# Altium PCB SAMV71_Xplained_Ultra.PcbDoc (part 1 of 9)
Units mm, origin at the board's own origin, x right, y up, seen from the top; angles counter-clockwise.
Board outline 90 x 135 mm, 8 copper layers (Top Layer LF-Signals, Ground Plane 1 (GND), Power Plane (VCC), Ground Plane 2 (GND), Signal Layer 1, Signal Layer 2, Ground Plane 3 (GND), Bottom Layer LF-Signals), stack 1.632 mm thick; 483 components, 411 nets, 1994 pads, 1021 vias.
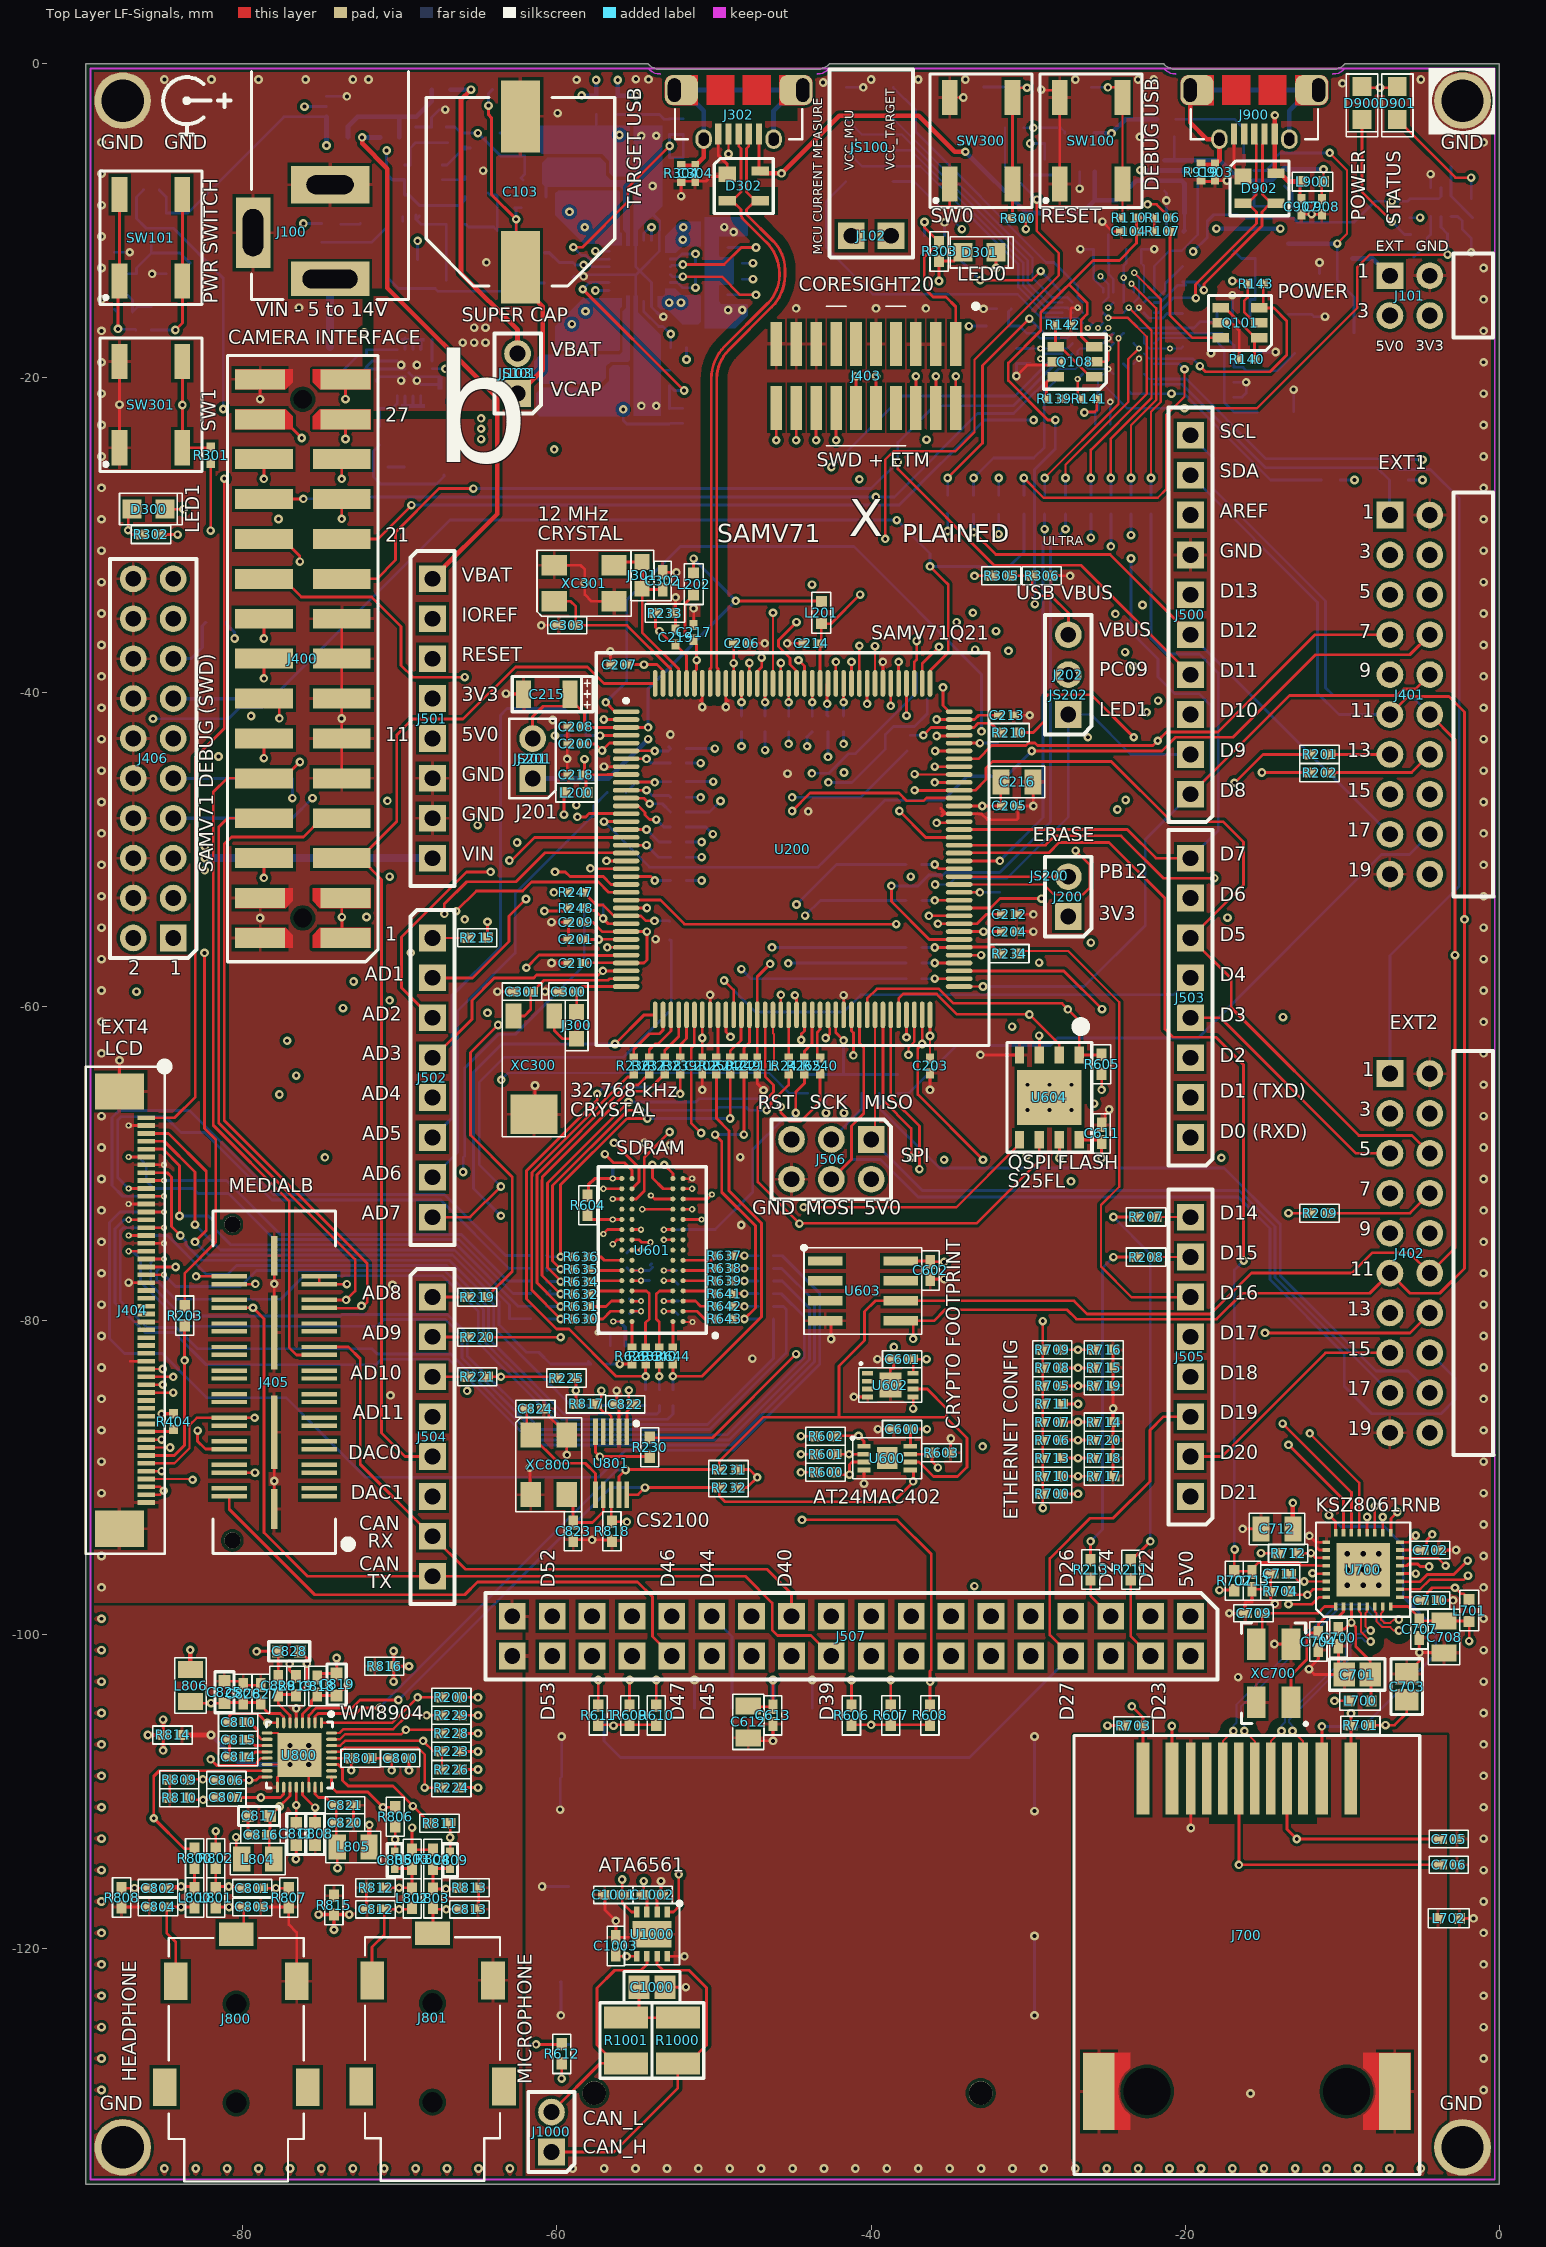
[diagram p0: Top Layer LF-Signals view]
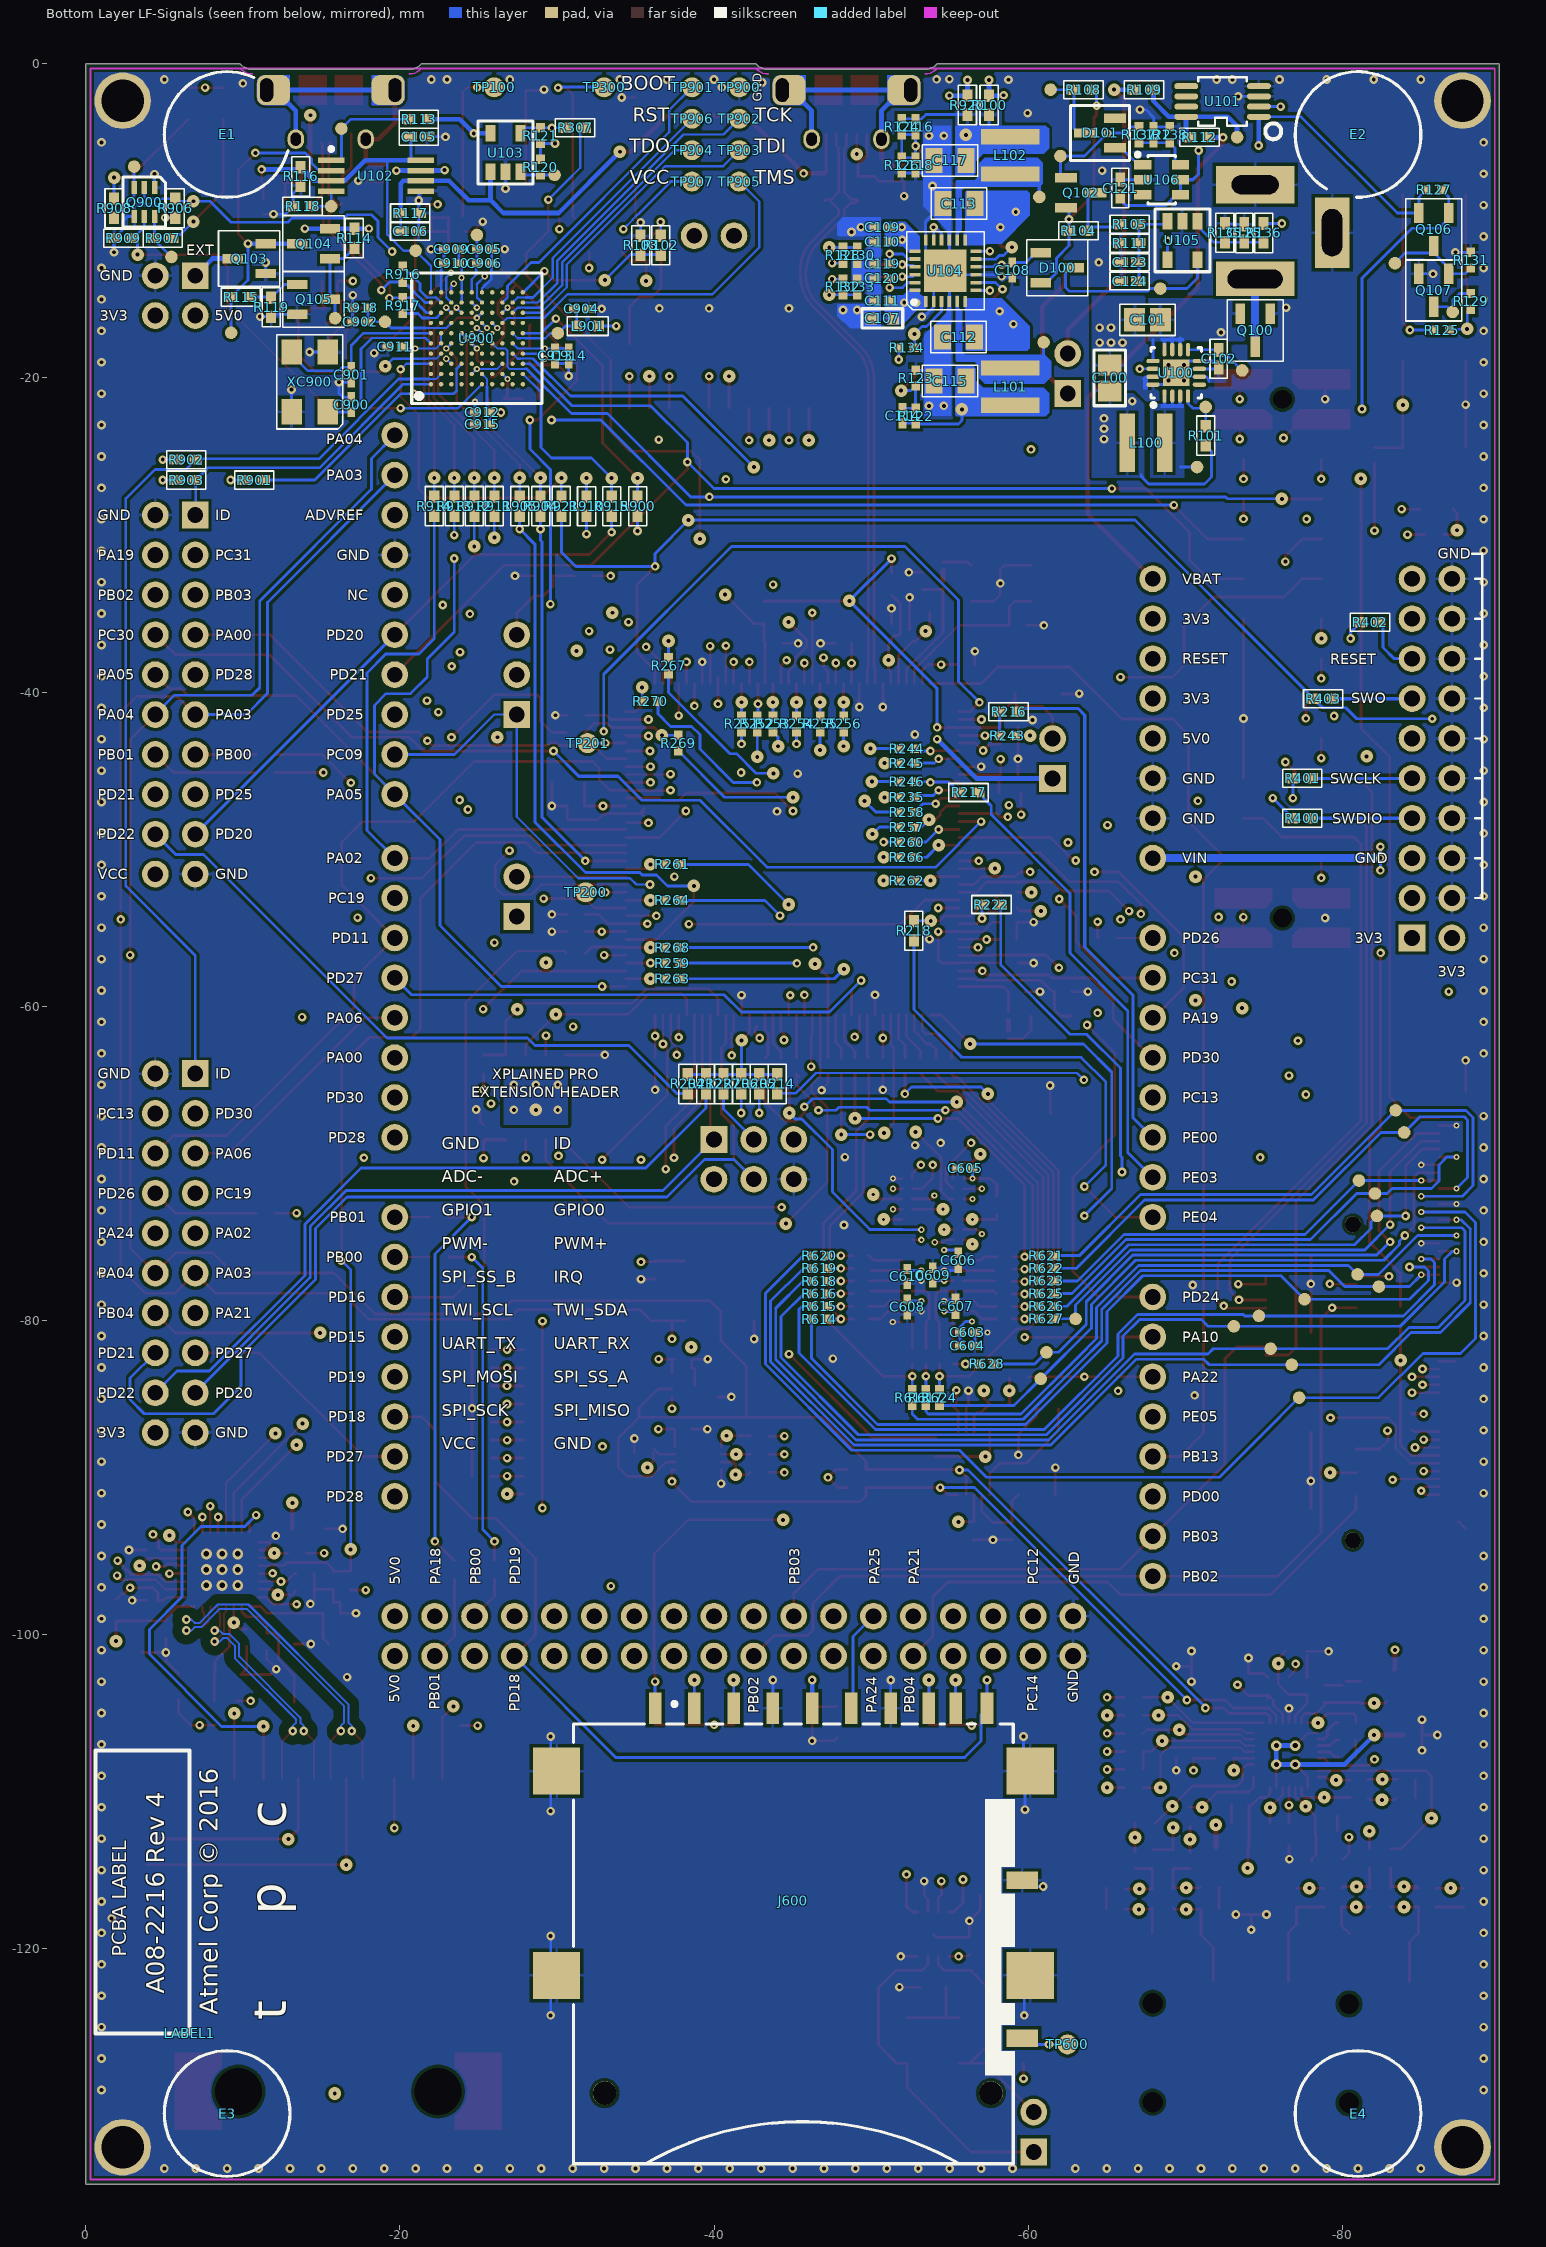
[diagram p1: Bottom Layer LF-Signals view, seen from below]
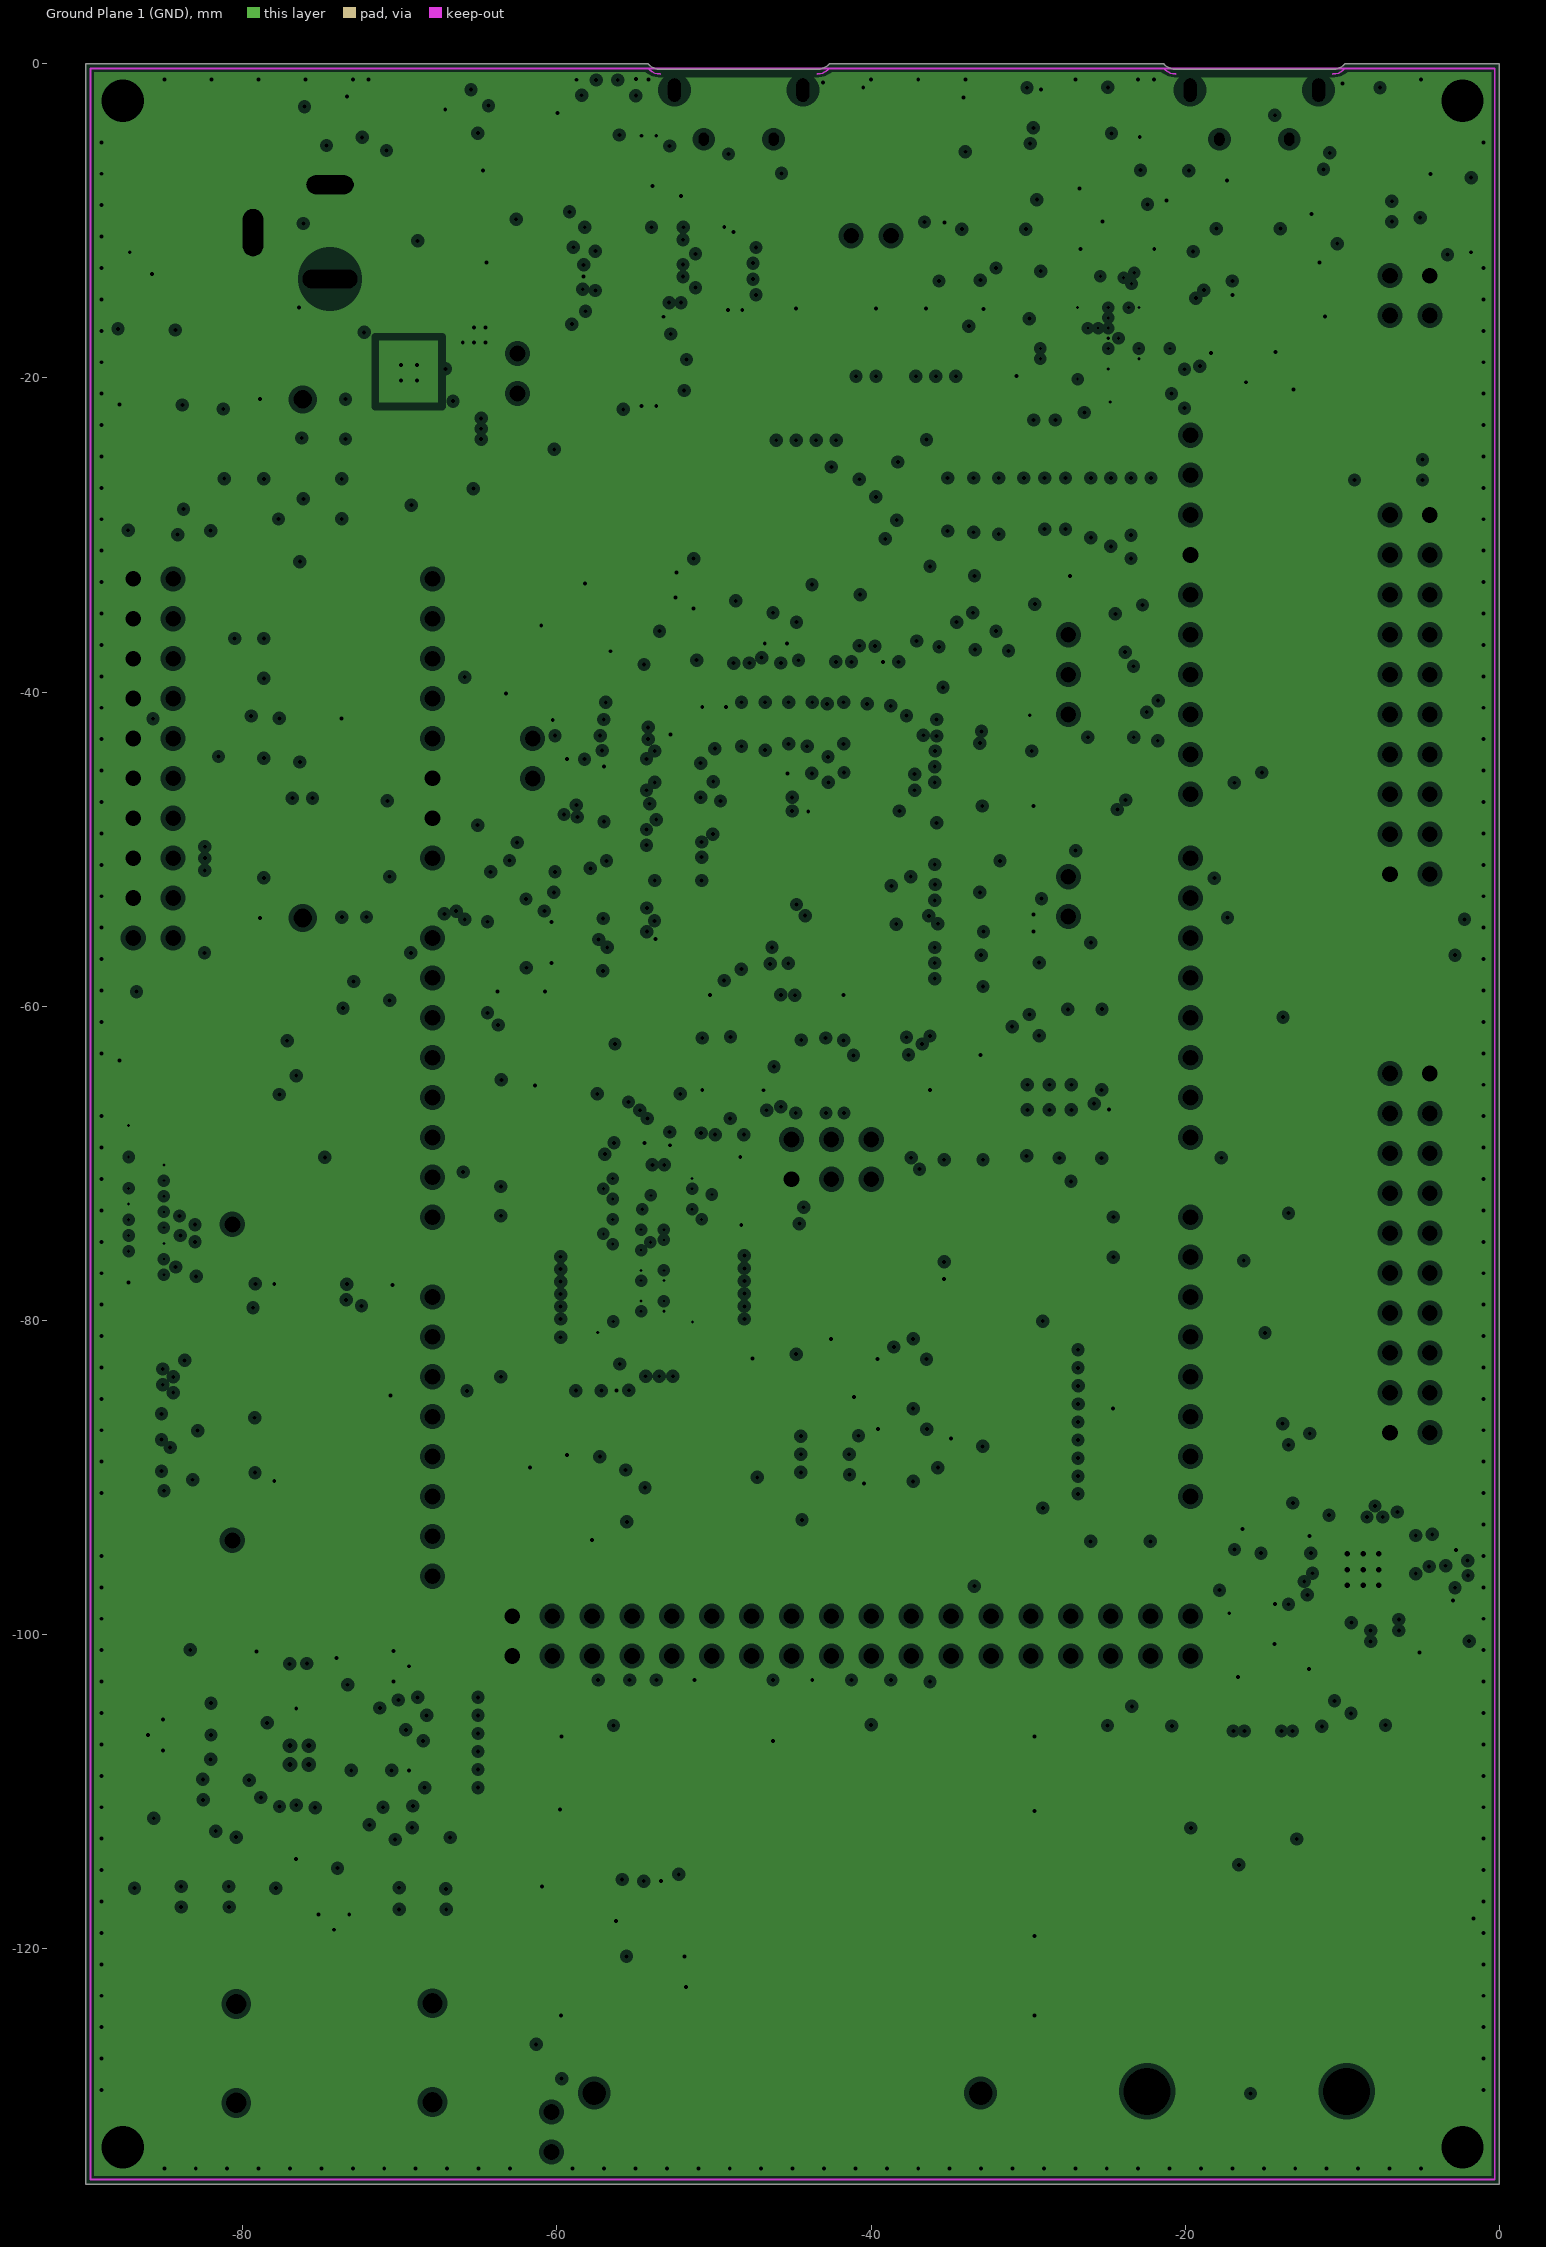
[diagram p2: Ground Plane 1 (GND), clearances drawn from the general rule]
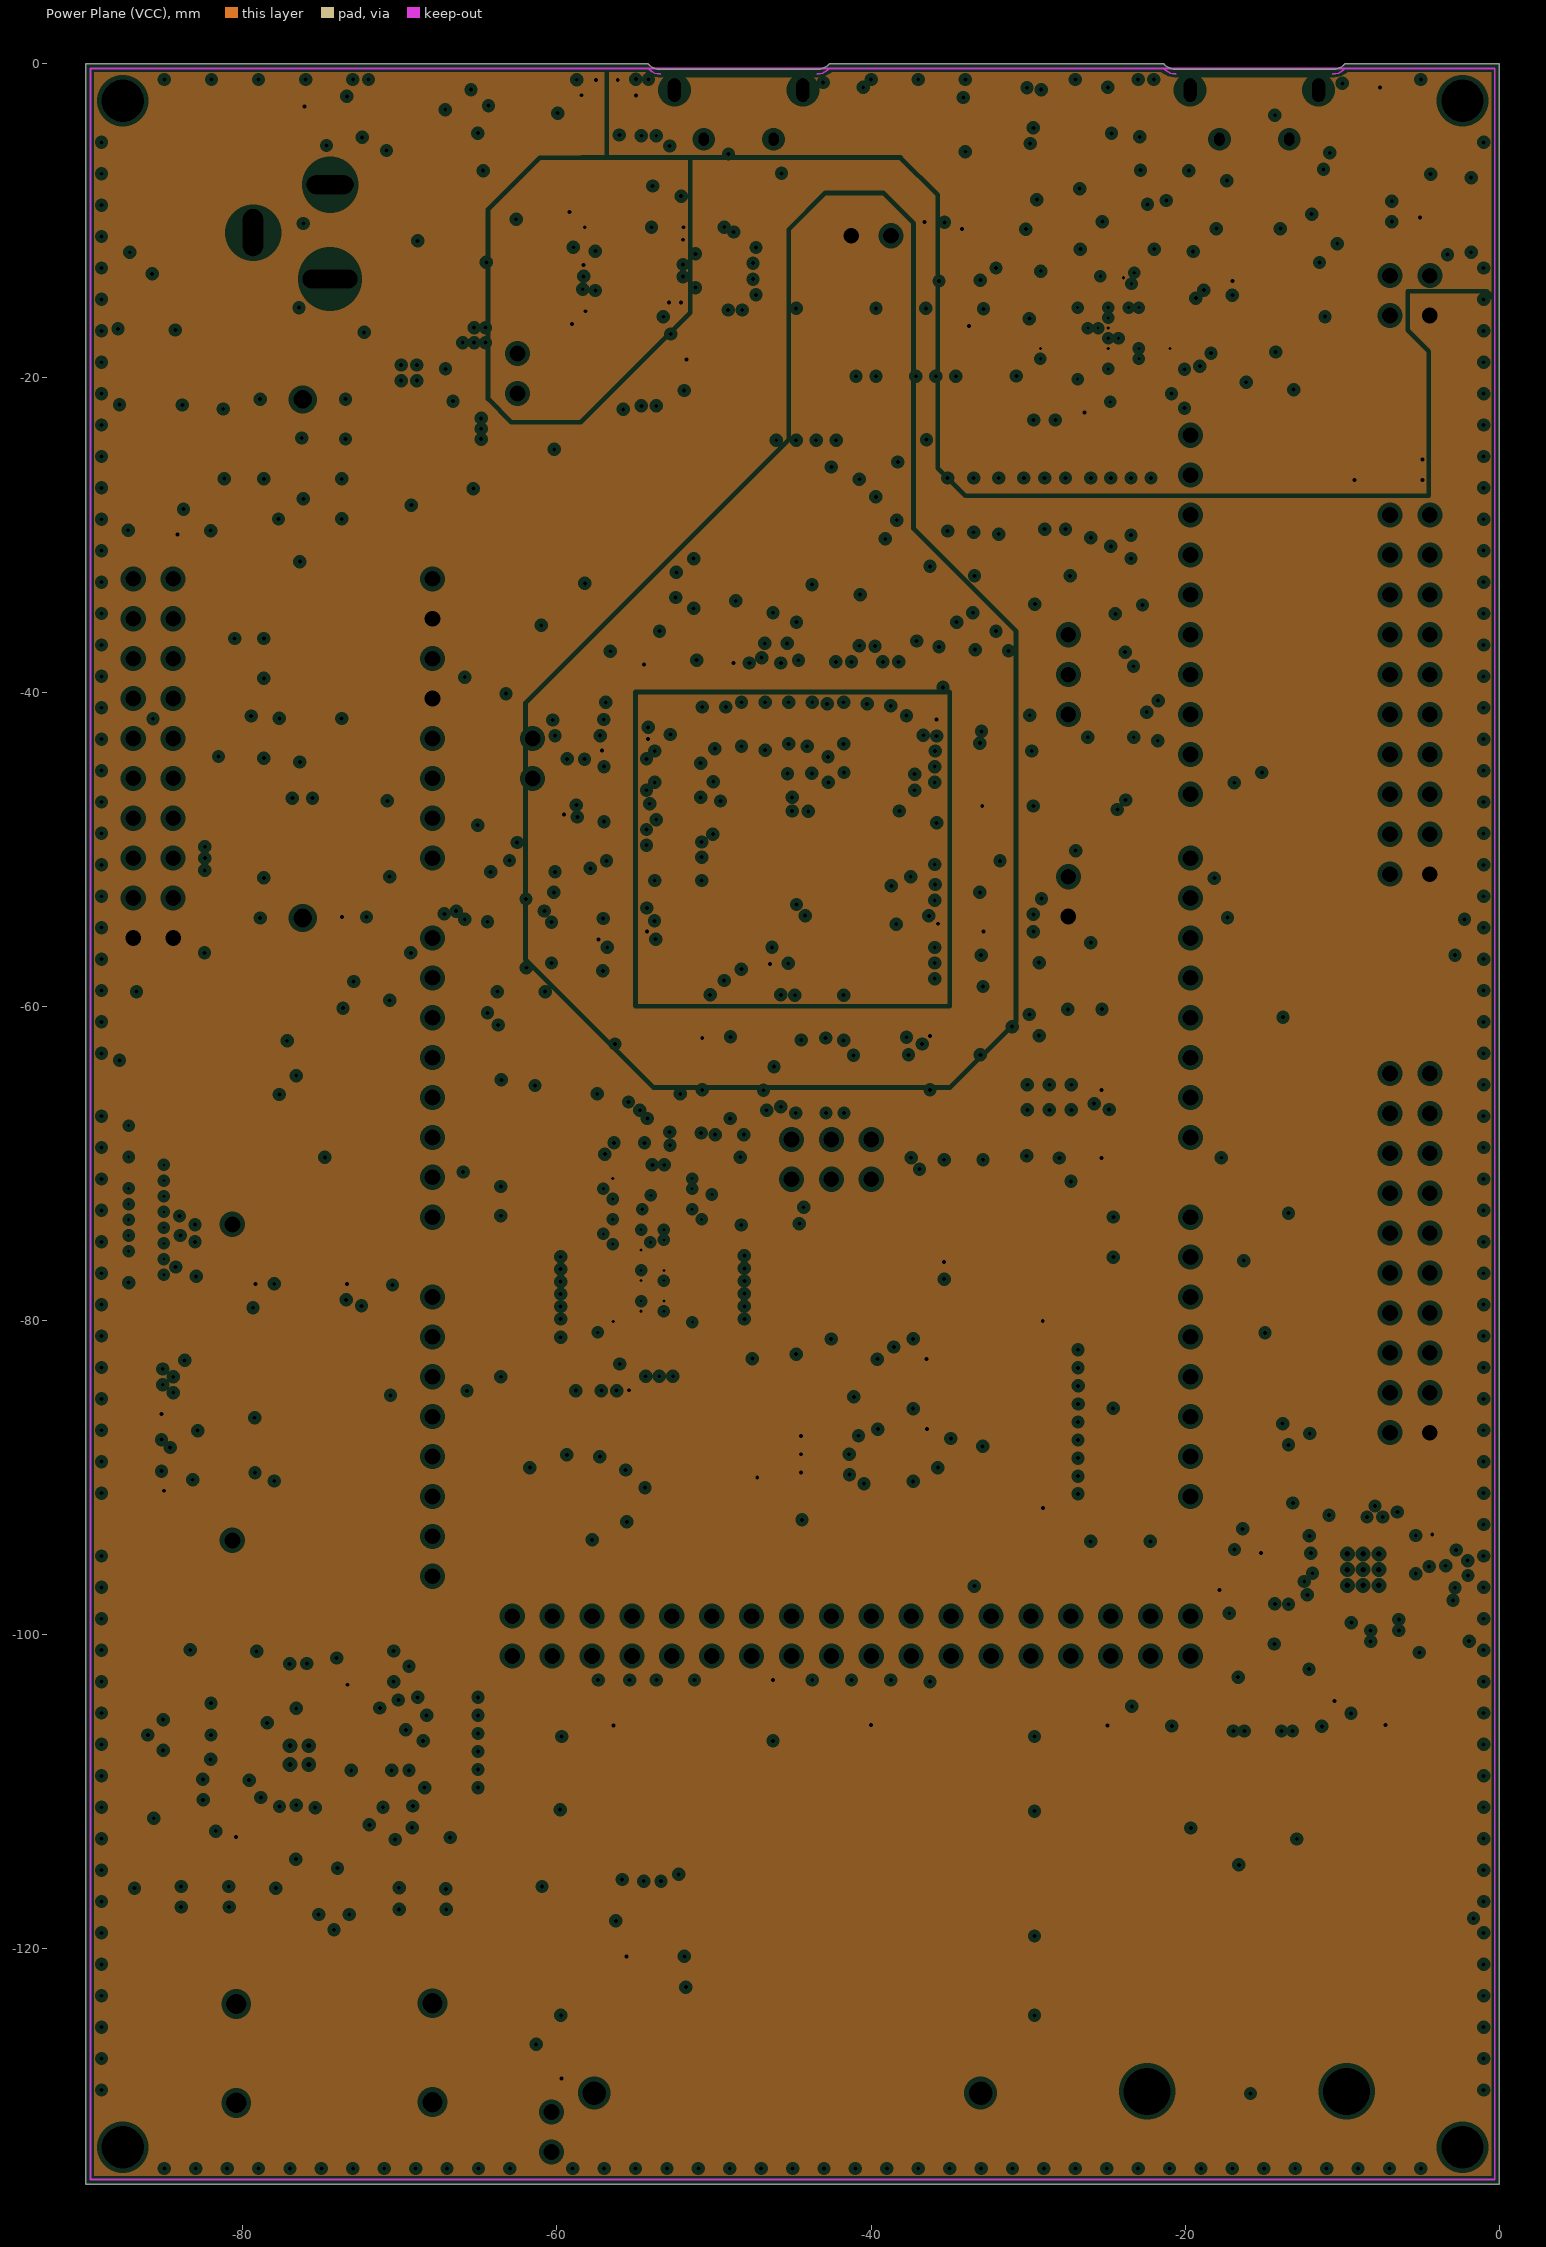
[diagram p3: Power Plane (VCC), clearances drawn from the general rule]
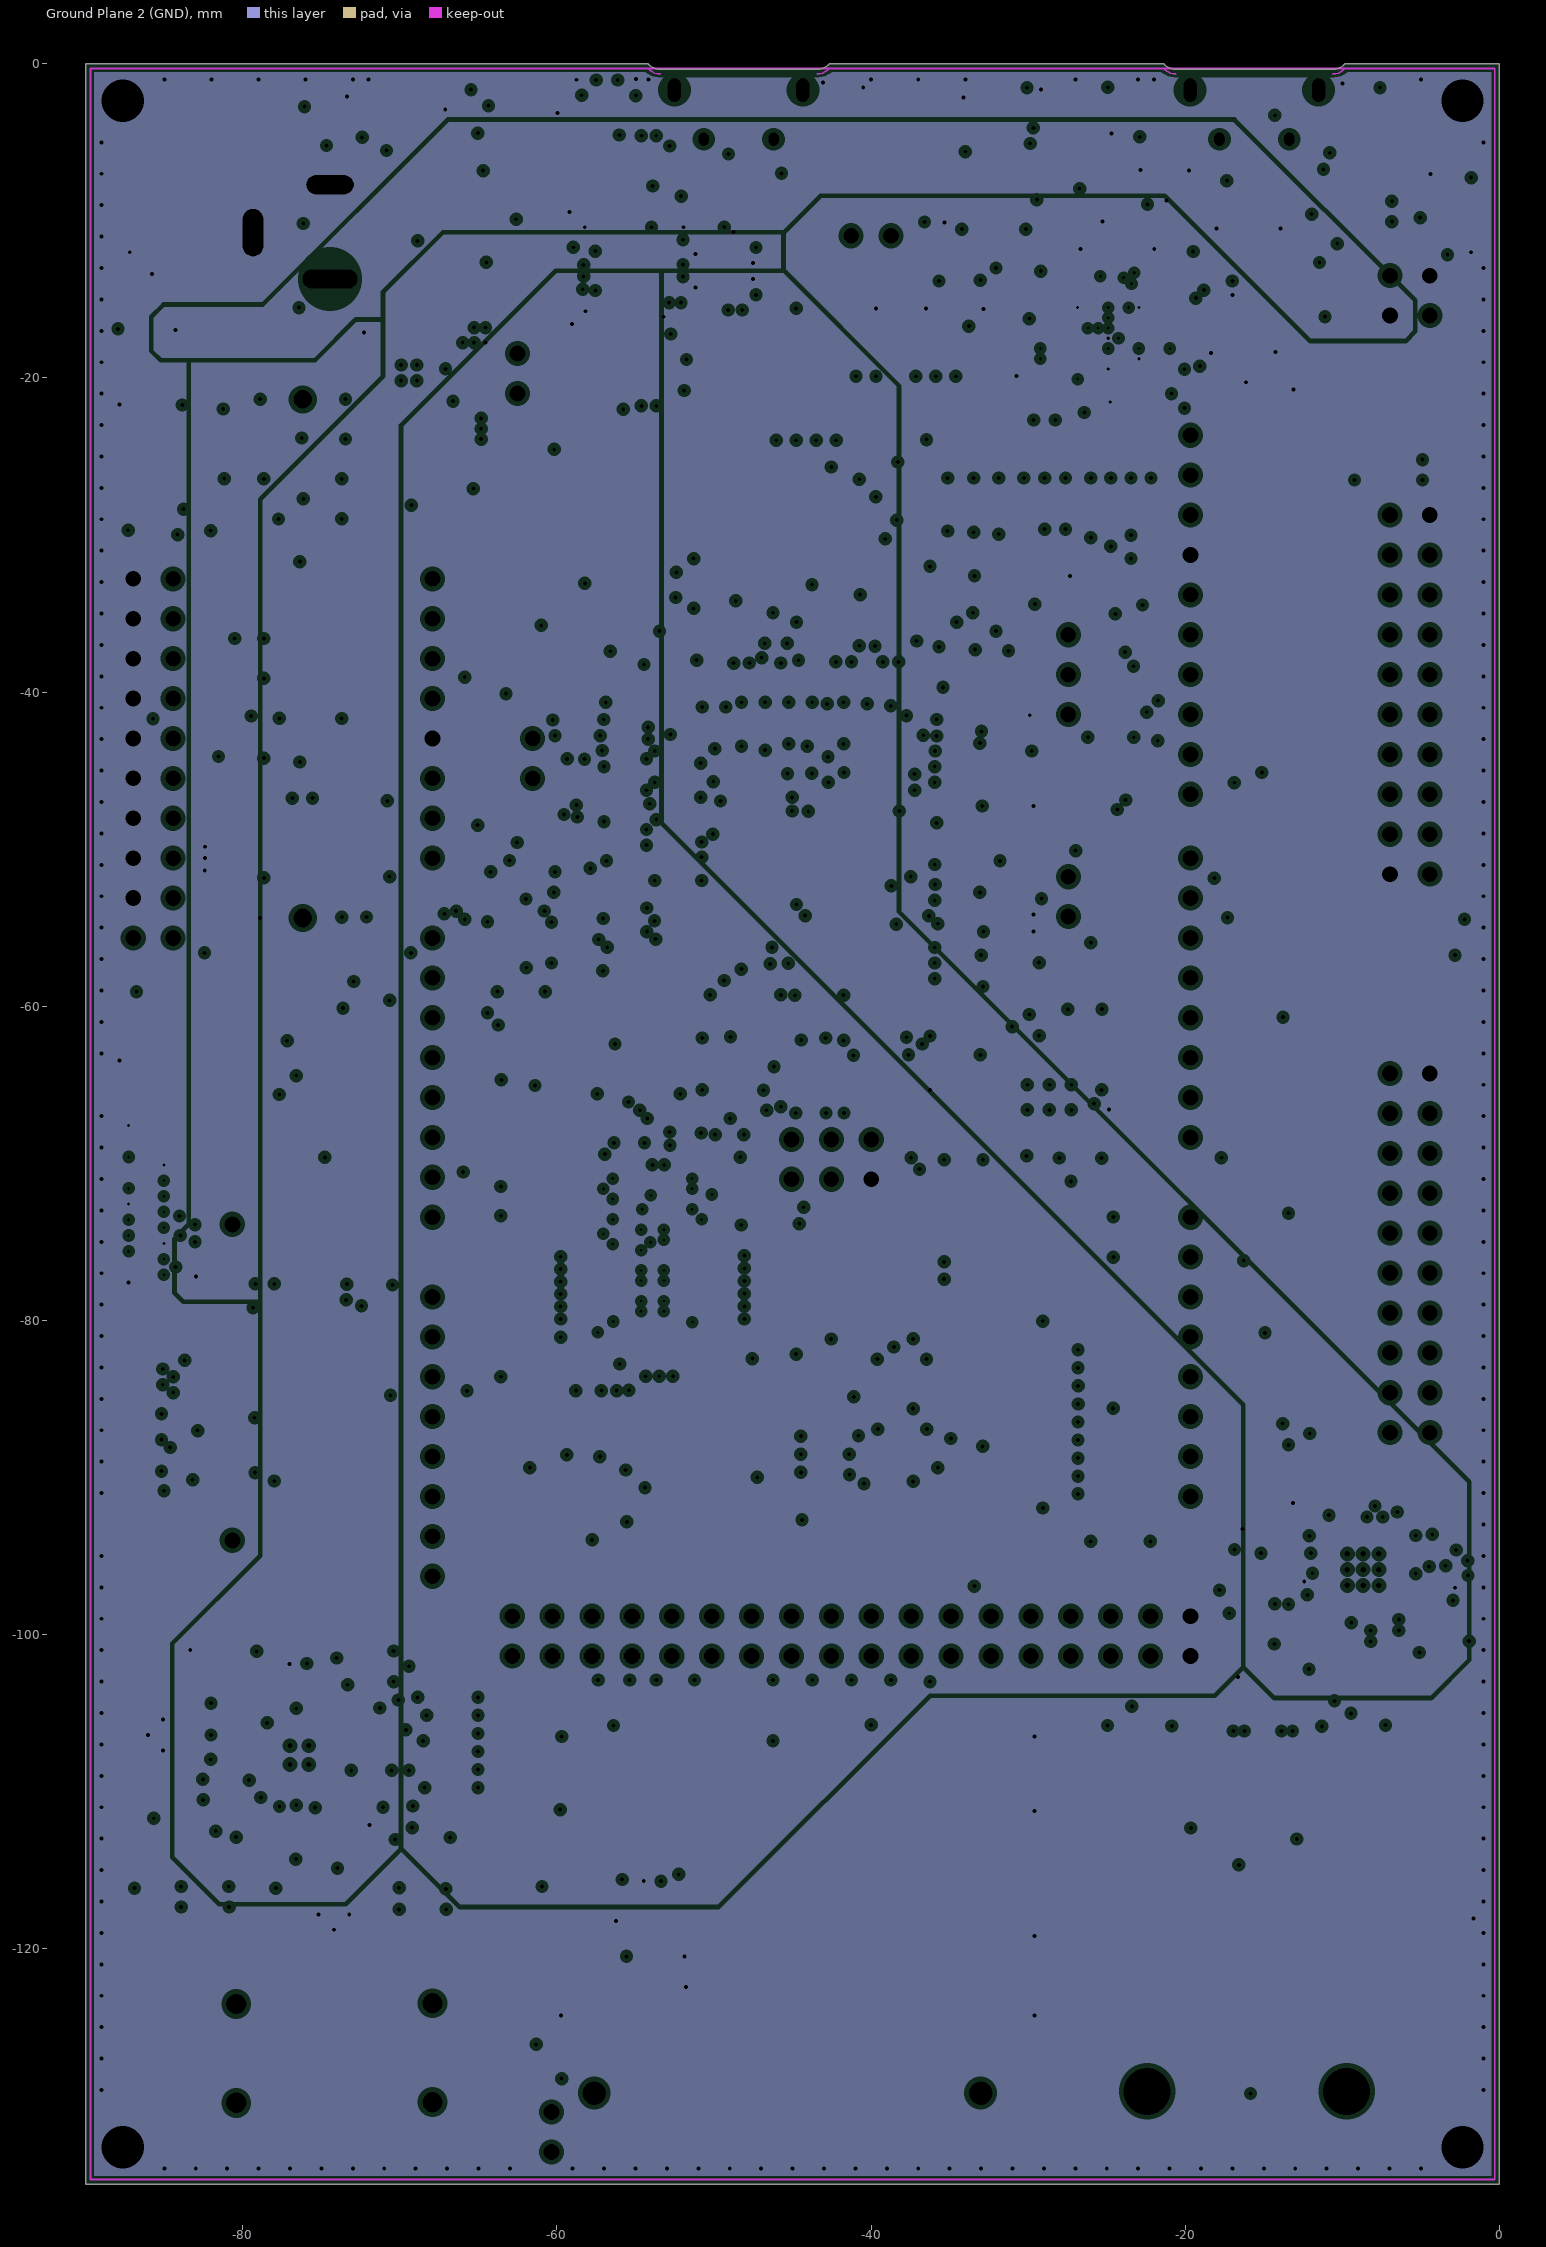
[diagram p4: Ground Plane 2 (GND), clearances drawn from the general rule]
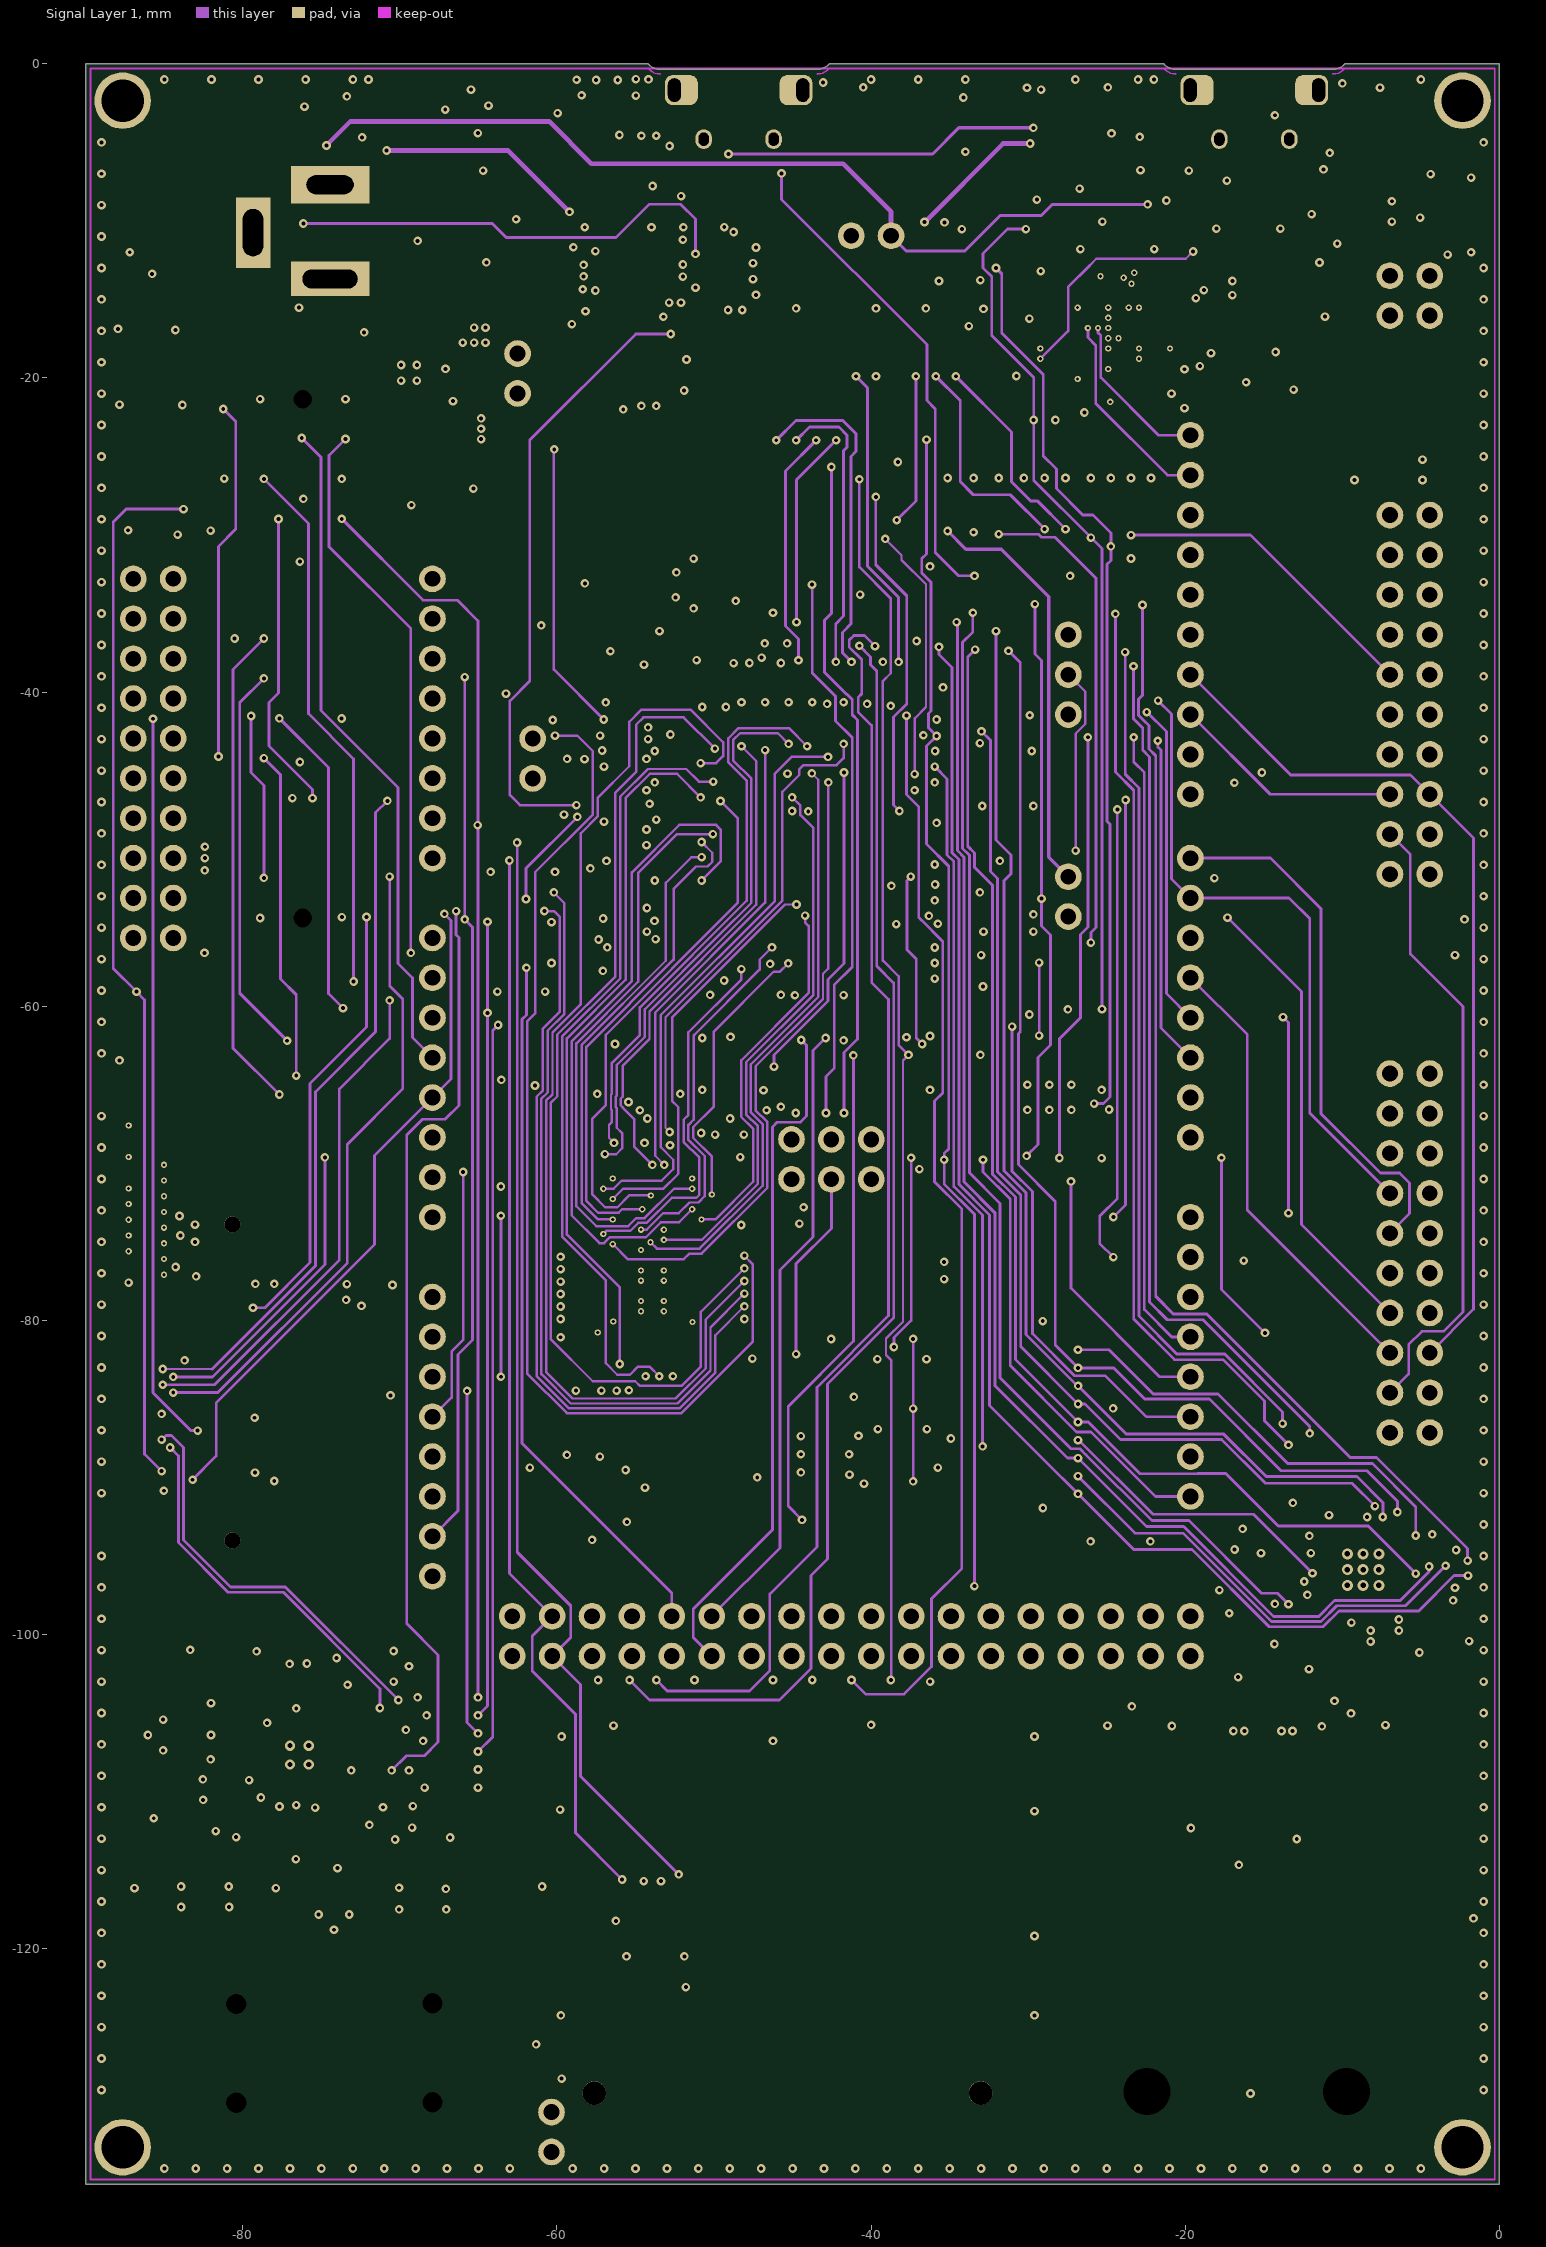
[diagram p5: Signal Layer 1]
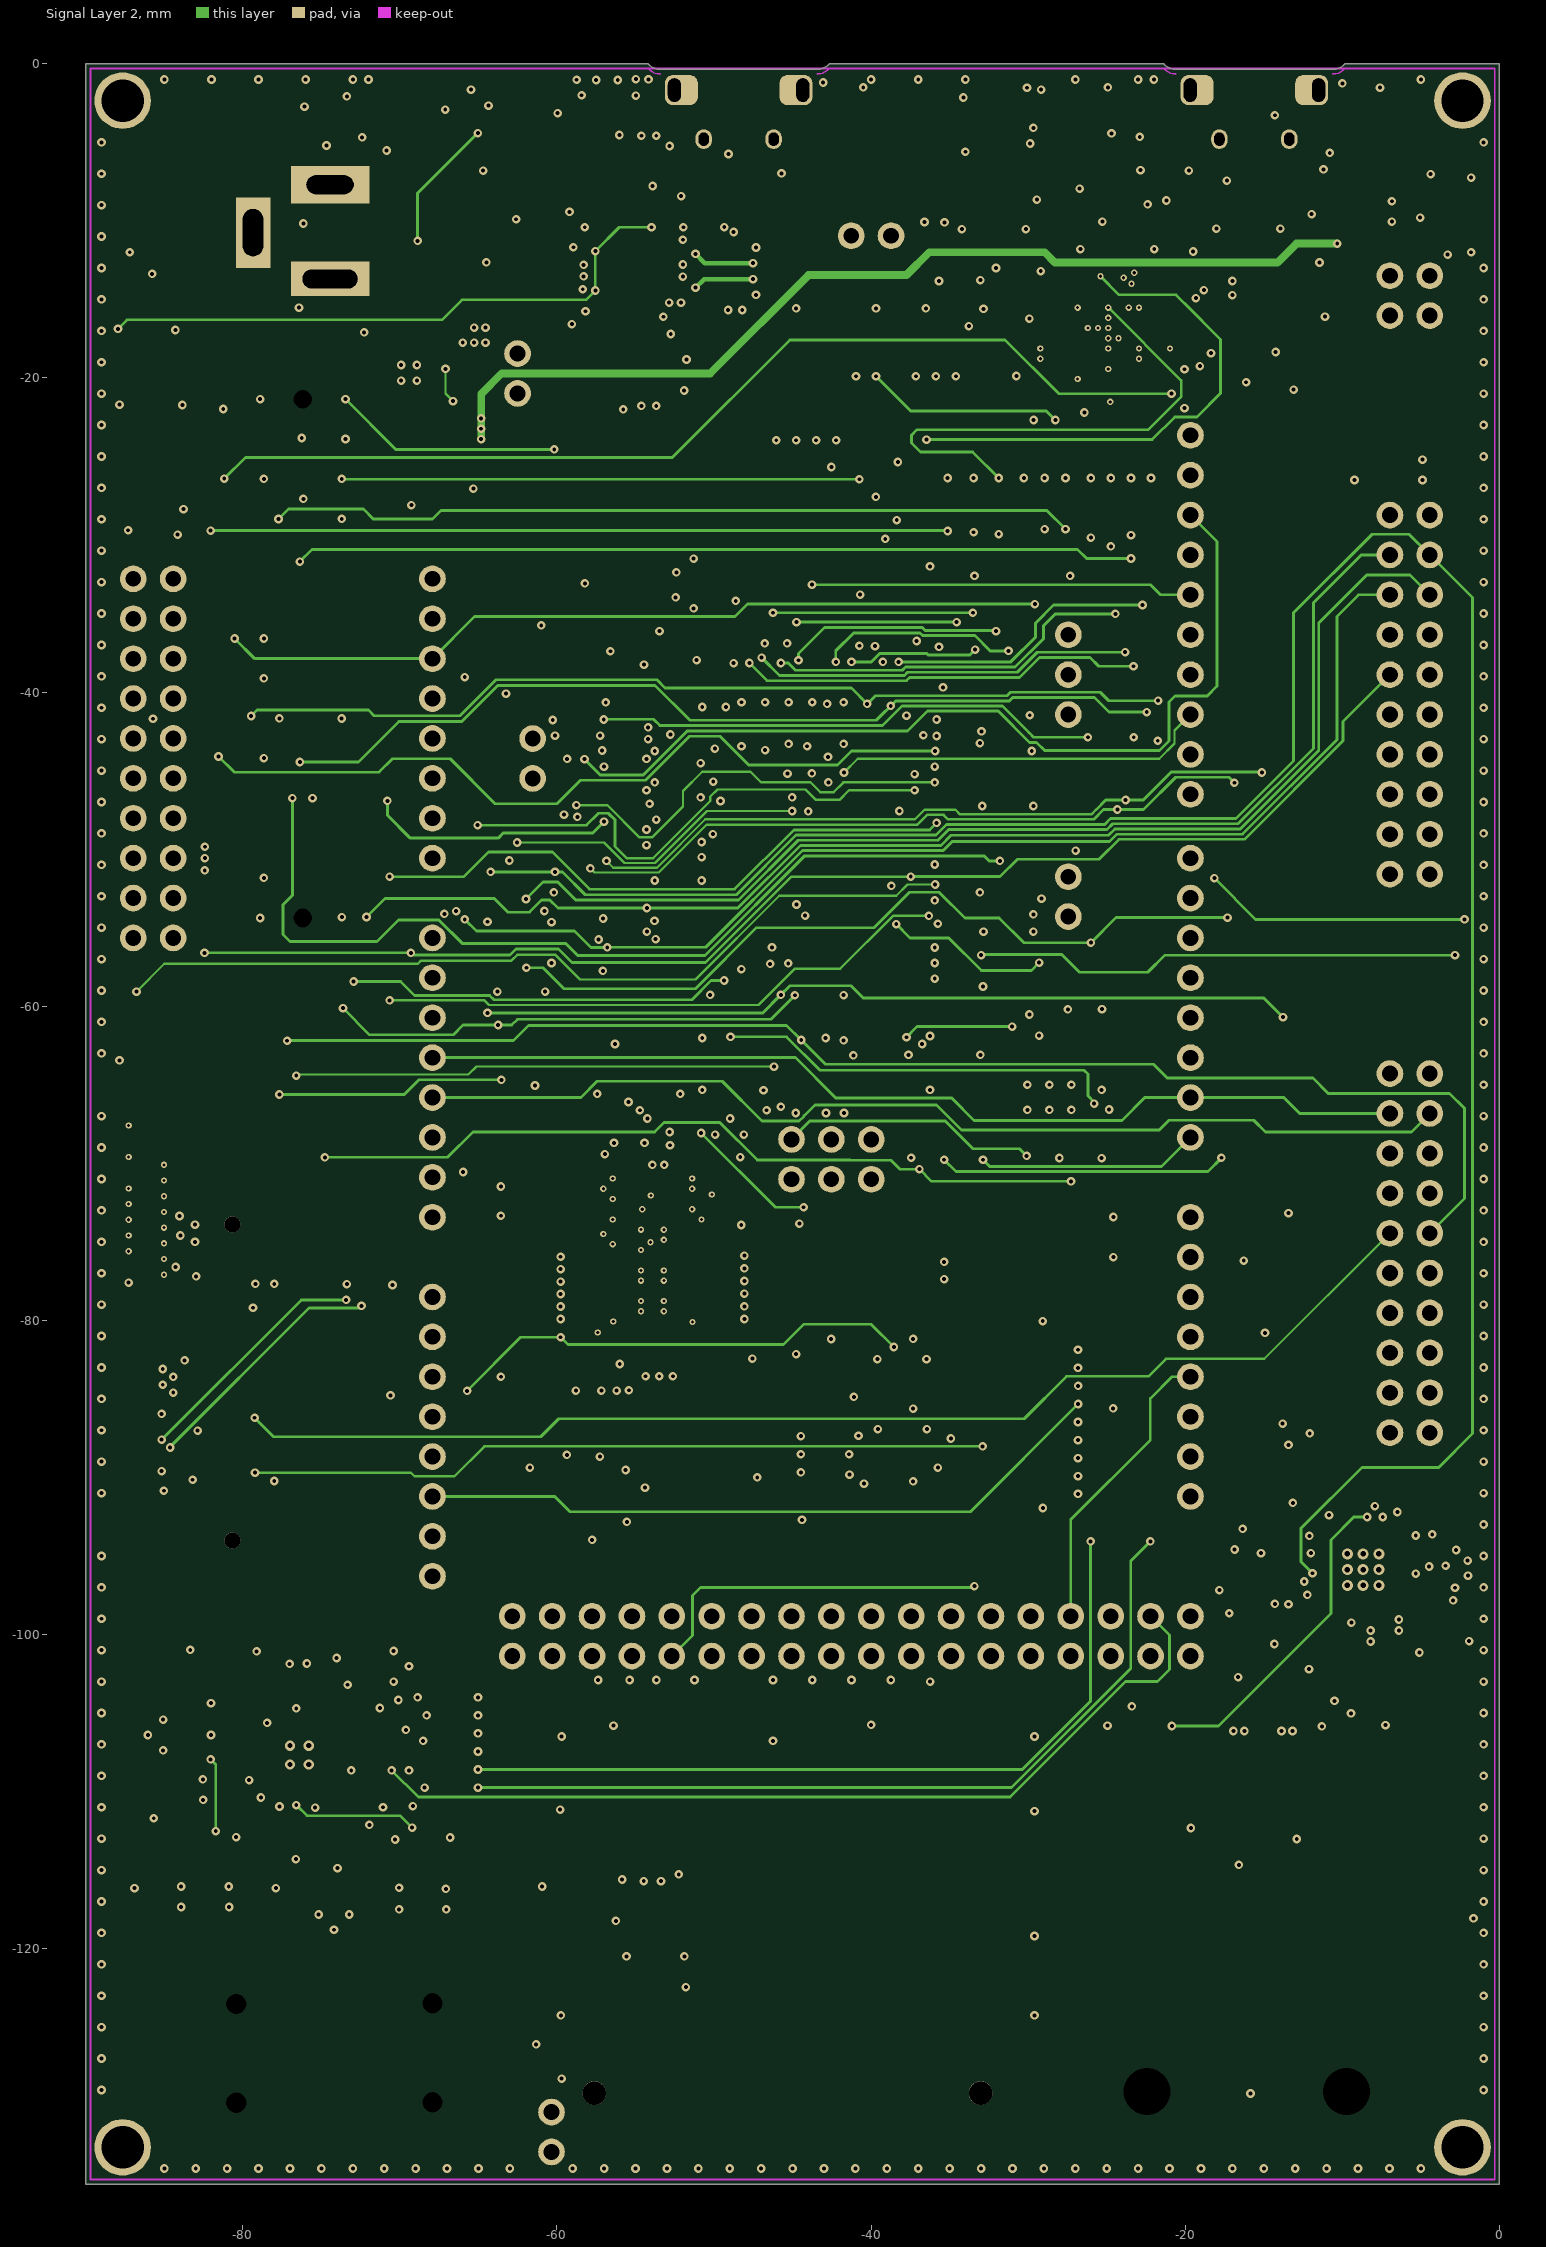
[diagram p6: Signal Layer 2]
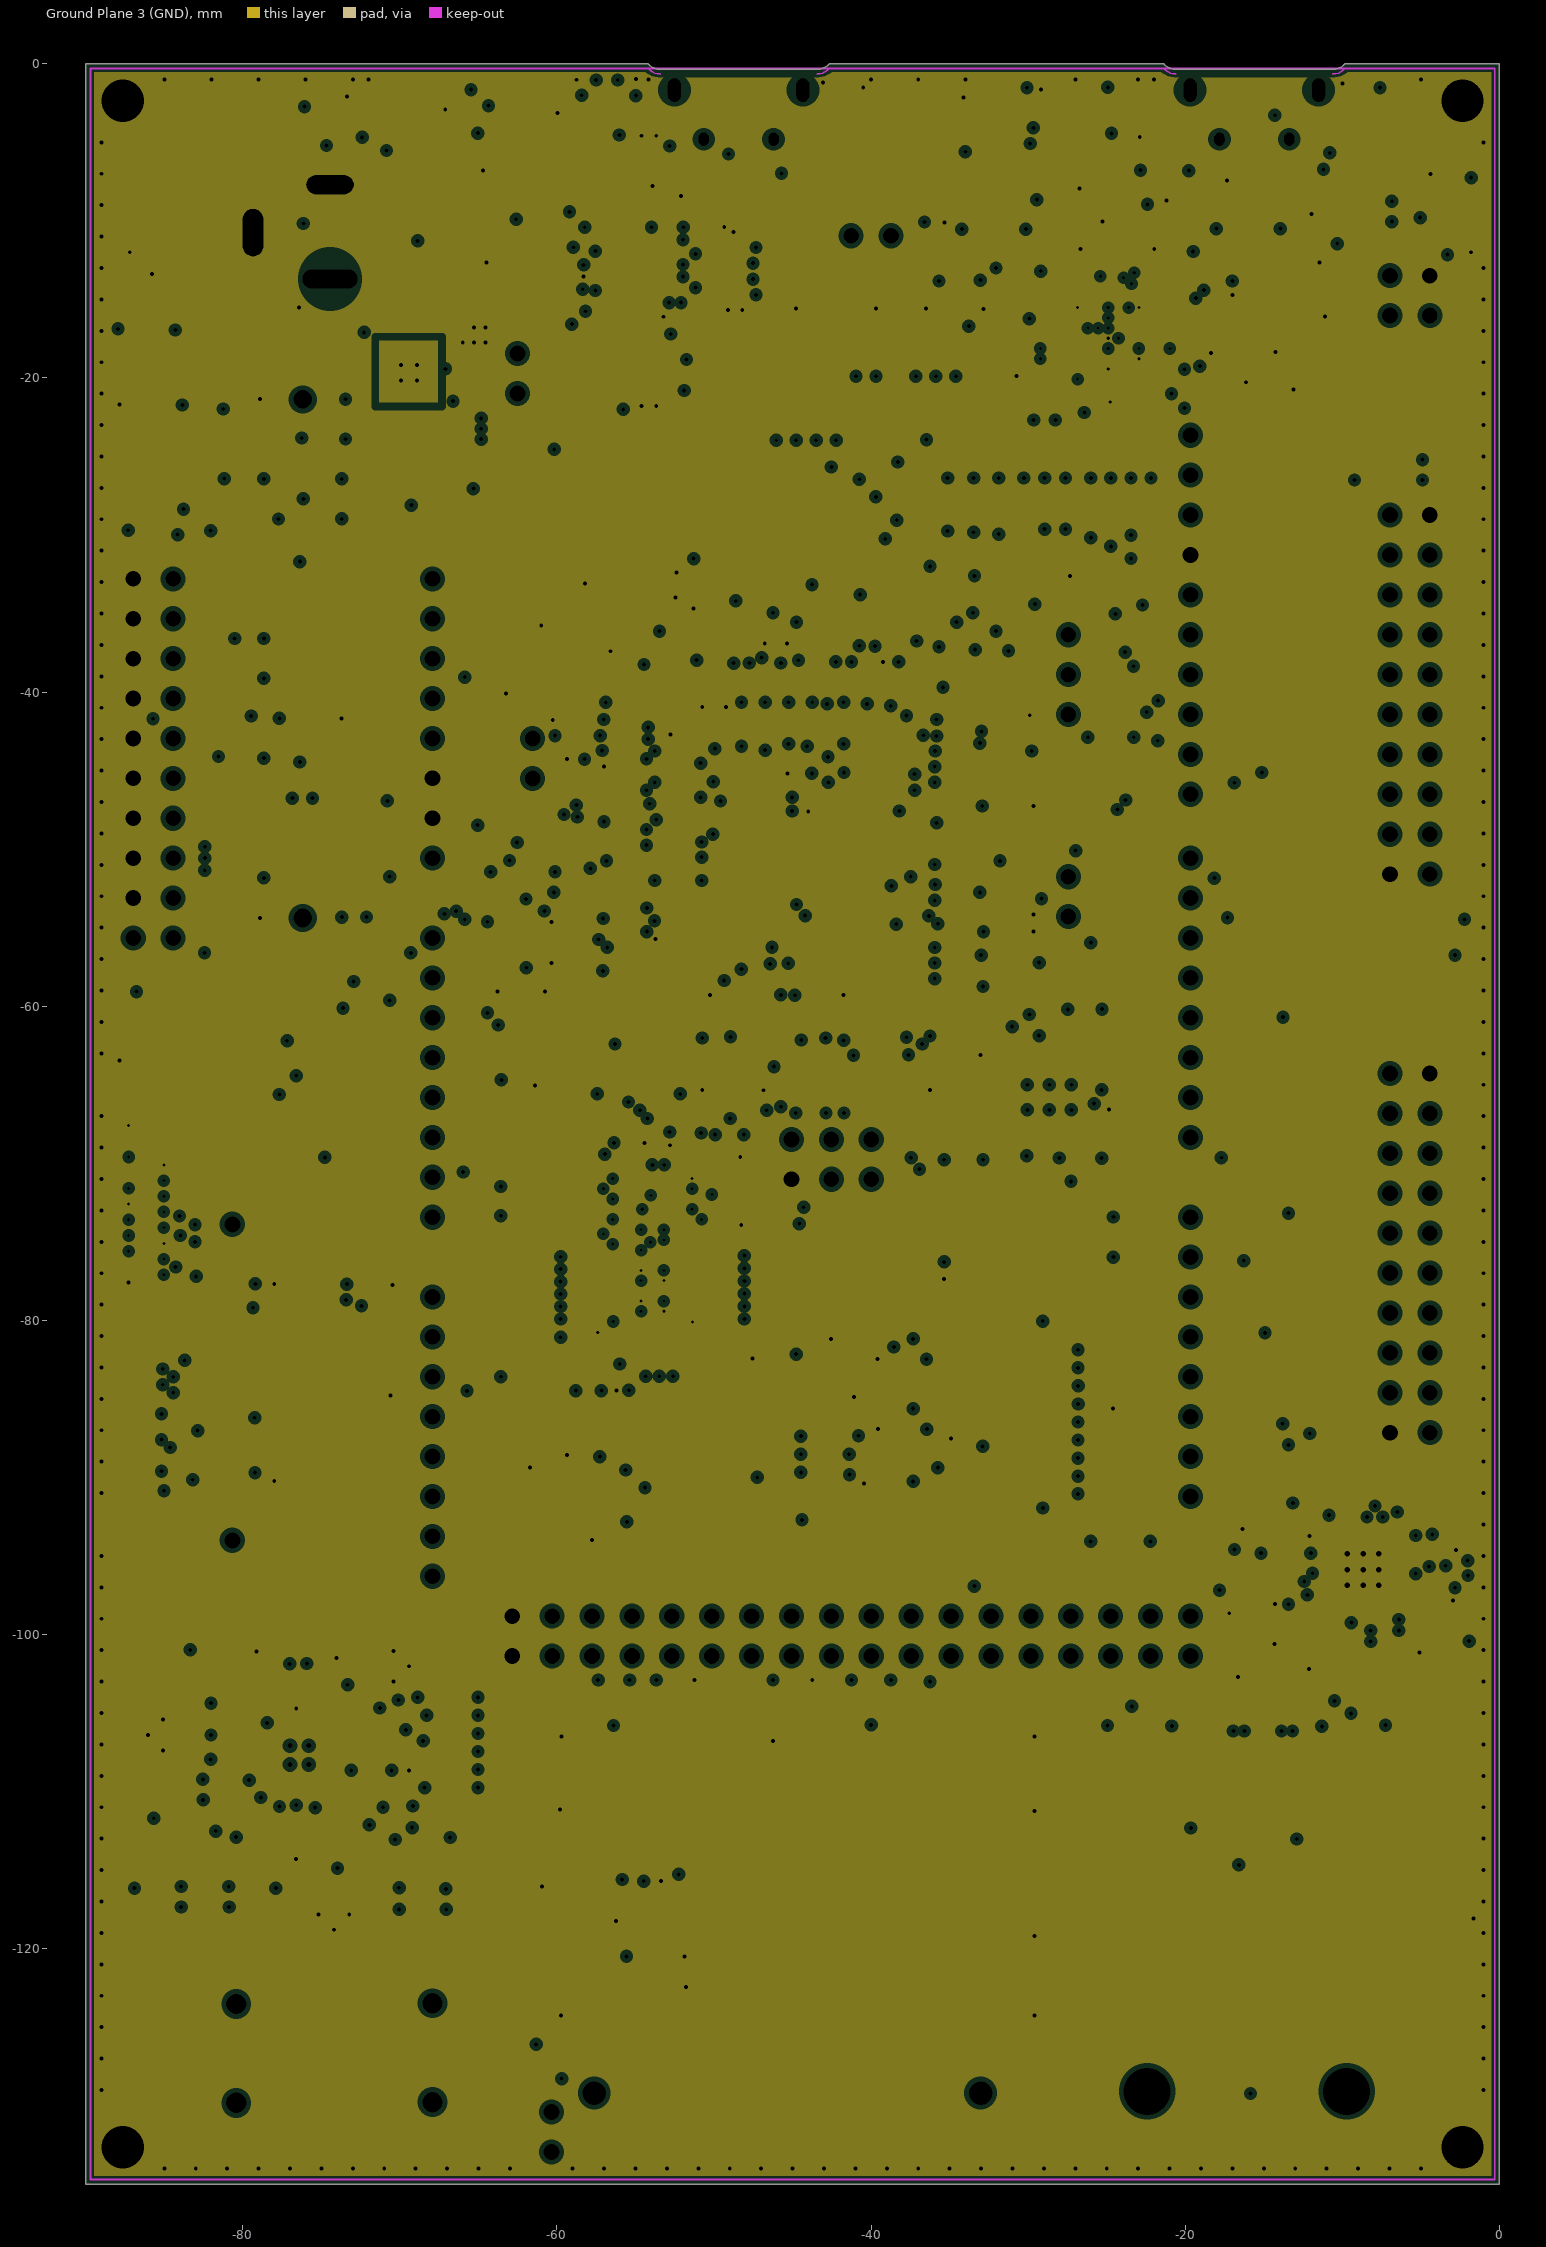
[diagram p7: Ground Plane 3 (GND), clearances drawn from the general rule]
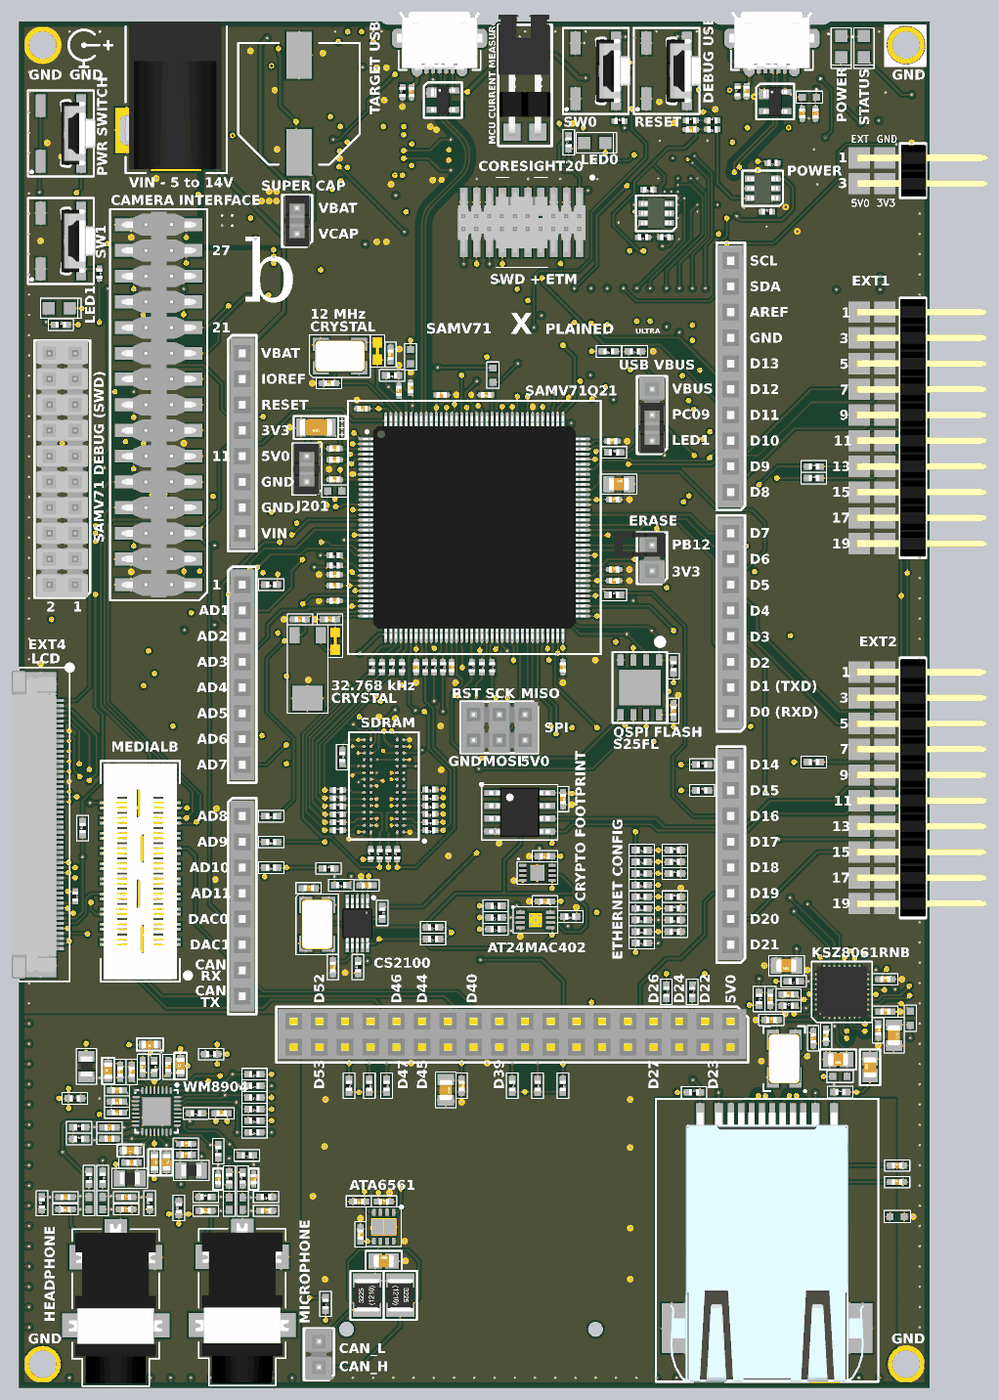
[diagram p15: 3D render of the assembled board from above, using the file's embedded part models]
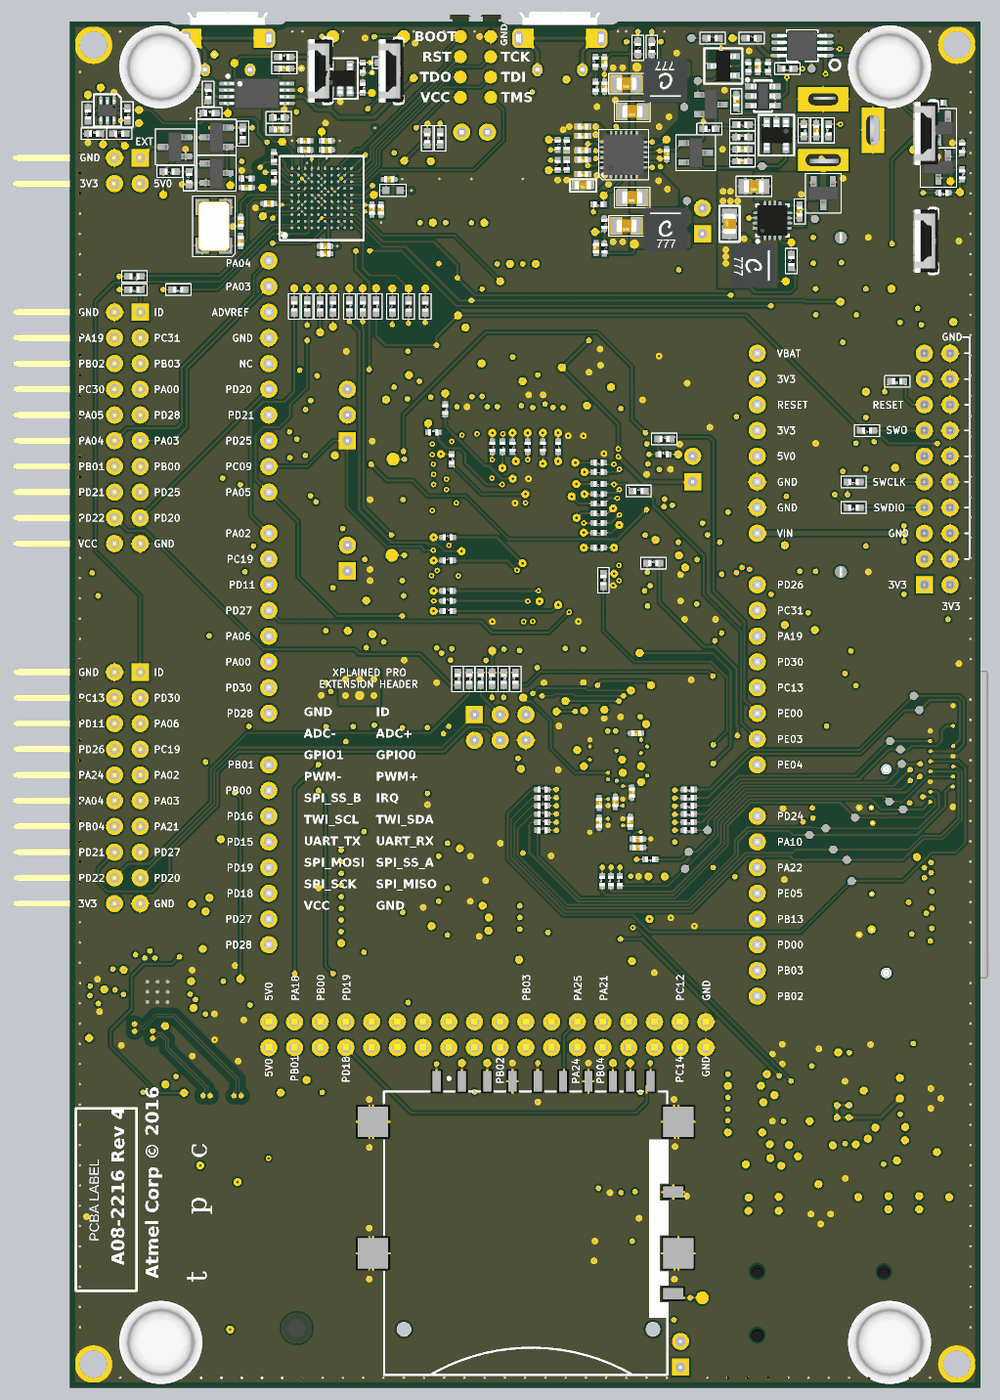
[diagram p16: 3D render of the assembled board from below, using the file's embedded part models]

## Layer stack, top to bottom
Top Solder: solder mask 0.0102, Solder Resist, Dk 3.5
Top Layer LF-Signals: signal copper 0.035
Dielectric 1: prepreg 0.113, 2116, Dk 4.2
Ground Plane 1 (GND): plane copper 0.035, net GND
Dielectric 2: core 0.2, FR-4, Dk 4.2
Power Plane (VCC): plane copper 0.035, net (Multiple Nets)
Dielectric 4: prepreg 0.183, Composite dielectric, Dk 4.15
Ground Plane 2 (GND): plane copper 0.035, net (Multiple Nets)
Dielectric 5: core 0.36, FR-4, Dk 4.2
Signal Layer 1: signal copper 0.035
Dielectric 7: prepreg 0.183, Composite dielectric, Dk 4.2
Signal Layer 2: signal copper 0.035
Dielectric 8: core 0.2, FR-4, Dk 4.2
Ground Plane 3 (GND): plane copper 0.035, net GND
Dielectric 9: prepreg 0.113, 2116, Dk 4.2
Bottom Layer LF-Signals: signal copper 0.035
Bottom Solder: solder mask 0.0102, Solder Resist, Dk 3.5

## Board outline
-90,-135 -90,0 -54.209,0 -54.209,-0.001 ccw(c-53.434,0.686) -53.434,-0.35 -43.434,-0.35 ccw(c-43.434,0.686) -42.659,-0.001 -42.659,0 -21.375,0 -21.375,-0.001 ccw(c-20.6,0.686) -20.6,-0.35 -10.6,-0.35 ccw(c-10.6,0.686) -9.825,-0.001 -9.825,0 0,0 0,-135

## Design rules (kind name [scope] priority, off if disabled: settings)
AcuteAngle [All] p1: minimum=7.00000000000000E+0001 checktracksonly=FALSE
AssemblyTestPointUsage "Schematic Assembly Testpoint Usage_141" [InNet('NetQ105_1')] p1: valid=1
AssemblyTestPointUsage "Schematic Assembly Testpoint Usage_140" [InNet('D13_LCD')] p2: valid=2
AssemblyTestPointUsage "Schematic Assembly Testpoint Usage_139" [InNet('D7_LCD')] p3: valid=2
AssemblyTestPointUsage "Schematic Assembly Testpoint Usage_138" [InNet('D9_LCD')] p4: valid=2
AssemblyTestPointUsage "Schematic Assembly Testpoint Usage_137" [InNet('D1_LCD')] p5: valid=2
AssemblyTestPointUsage "Schematic Assembly Testpoint Usage_136" [InNet('D4_LCD')] p6: valid=2
AssemblyTestPointUsage "Schematic Assembly Testpoint Usage_135" [InNet('D14_LCD')] p7: valid=2
AssemblyTestPointUsage "Schematic Assembly Testpoint Usage_134" [InNet('D15_LCD')] p8: valid=2
AssemblyTestPointUsage "Schematic Assembly Testpoint Usage_133" [InNet('D8_LCD')] p9: valid=2
AssemblyTestPointUsage "Schematic Assembly Testpoint Usage_132" [InNet('D3_LCD')] p10: valid=2
AssemblyTestPointUsage "Schematic Assembly Testpoint Usage_131" [InNet('D6_LCD')] p11: valid=2
AssemblyTestPointUsage "Schematic Assembly Testpoint Usage_130" [InNet('D2_LCD')] p12: valid=2
AssemblyTestPointUsage "Schematic Assembly Testpoint Usage_129" [InNet('D5_LCD')] p13: valid=2
AssemblyTestPointUsage "Schematic Assembly Testpoint Usage_128" [InNet('D11_LCD')] p14: valid=2
AssemblyTestPointUsage "Schematic Assembly Testpoint Usage_127" [InNet('D0_LCD')] p15: valid=2
AssemblyTestPointUsage "Schematic Assembly Testpoint Usage_126" [InNet('D10_LCD')] p16: valid=2
AssemblyTestPointUsage "Schematic Assembly Testpoint Usage_125" [InNet('D12_LCD')] p17: valid=2
AssemblyTestPointUsage "Schematic Assembly Testpoint Usage_124" [InNet('DQ12')] p18: valid=2
AssemblyTestPointUsage "Schematic Assembly Testpoint Usage_123" [InNet('DQ9')] p19: valid=2
AssemblyTestPointUsage "Schematic Assembly Testpoint Usage_122" [InNet('DQ15')] p20: valid=2
AssemblyTestPointUsage "Schematic Assembly Testpoint Usage_121" [InNet('DQ5')] p21: valid=2
AssemblyTestPointUsage "Schematic Assembly Testpoint Usage_120" [InNet('DQ13')] p22: valid=2
AssemblyTestPointUsage "Schematic Assembly Testpoint Usage_119" [InNet('DQ6')] p23: valid=2
AssemblyTestPointUsage "Schematic Assembly Testpoint Usage_118" [InNet('DQ2')] p24: valid=2
AssemblyTestPointUsage "Schematic Assembly Testpoint Usage_117" [InNet('DQ1')] p25: valid=2
AssemblyTestPointUsage "Schematic Assembly Testpoint Usage_116" [InNet('DQ8')] p26: valid=2
AssemblyTestPointUsage "Schematic Assembly Testpoint Usage_115" [InNet('DQ14')] p27: valid=2
AssemblyTestPointUsage "Schematic Assembly Testpoint Usage_114" [InNet('DQ0')] p28: valid=2
AssemblyTestPointUsage "Schematic Assembly Testpoint Usage_113" [InNet('DQ10')] p29: valid=2
AssemblyTestPointUsage "Schematic Assembly Testpoint Usage_112" [InNet('DQ11')] p30: valid=2
AssemblyTestPointUsage "Schematic Assembly Testpoint Usage_111" [InNet('DQ3')] p31: valid=2
AssemblyTestPointUsage "Schematic Assembly Testpoint Usage_110" [InNet('DQ7')] p32: valid=2
AssemblyTestPointUsage "Schematic Assembly Testpoint Usage_109" [InNet('DQ4')] p33: valid=2
AssemblyTestPointUsage "Schematic Assembly Testpoint Usage_100" [InNet('PC29')] p34: valid=2
AssemblyTestPointUsage "Schematic Assembly Testpoint Usage_99" [InNet('PC27')] p35: valid=2
AssemblyTestPointUsage "Schematic Assembly Testpoint Usage_98" [InNet('PC21')] p36: valid=2
AssemblyTestPointUsage "Schematic Assembly Testpoint Usage_107" [InNet('PD23')] p37: valid=2
AssemblyTestPointUsage "Schematic Assembly Testpoint Usage_105" [InNet('PC28')] p38: valid=2
AssemblyTestPointUsage "Schematic Assembly Testpoint Usage_71" [InNet('SDCKE')] p39: valid=2
AssemblyTestPointUsage "Schematic Assembly Testpoint Usage_69" [InNet('D3')] p40: valid=2
AssemblyTestPointUsage "Schematic Assembly Testpoint Usage_66" [InNet('D6')] p41: valid=2
AssemblyTestPointUsage "Schematic Assembly Testpoint Usage_65" [InNet('D15')] p42: valid=2
AssemblyTestPointUsage "Schematic Assembly Testpoint Usage_68" [InNet('D1')] p43: valid=2
AssemblyTestPointUsage "Schematic Assembly Testpoint Usage_67" [InNet('D2')] p44: valid=2
AssemblyTestPointUsage "Schematic Assembly Testpoint Usage_64" [InNet('PA15')] p45: valid=2
AssemblyTestPointUsage "Schematic Assembly Testpoint Usage_63" [InNet('PE05')] p46: valid=2
AssemblyTestPointUsage "Schematic Assembly Testpoint Usage_62" [InNet('PE04')] p47: valid=2
AssemblyTestPointUsage "Schematic Assembly Testpoint Usage_61" [InNet('PE03')] p48: valid=2
AssemblyTestPointUsage "Schematic Assembly Testpoint Usage_60" [InNet('PE02')] p49: valid=2
AssemblyTestPointUsage "Schematic Assembly Testpoint Usage_59" [InNet('PE01')] p50: valid=2
AssemblyTestPointUsage "Schematic Assembly Testpoint Usage_58" [InNet('PE00')] p51: valid=2
AssemblyTestPointUsage "Schematic Assembly Testpoint Usage_57" [InNet('PC07')] p52: valid=2
AssemblyTestPointUsage "Schematic Assembly Testpoint Usage_56" [InNet('PC06')] p53: valid=2
AssemblyTestPointUsage "Schematic Assembly Testpoint Usage_55" [InNet('PC05')] p54: valid=2
AssemblyTestPointUsage "Schematic Assembly Testpoint Usage_54" [InNet('PC04')] p55: valid=2
AssemblyTestPointUsage "Schematic Assembly Testpoint Usage_53" [InNet('PC03')] p56: valid=2
AssemblyTestPointUsage "Schematic Assembly Testpoint Usage_52" [InNet('PC02')] p57: valid=2
AssemblyTestPointUsage "Schematic Assembly Testpoint Usage_51" [InNet('PC01')] p58: valid=2
AssemblyTestPointUsage "Schematic Assembly Testpoint Usage_49" [InNet('PA16')] p59: valid=2
AssemblyTestPointUsage "Schematic Assembly Testpoint Usage_50" [InNet('PC00')] p60: valid=2
AssemblyTestPointUsage "Schematic Assembly Testpoint Usage_43" [InNet('NetJ404_41')] p61: valid=1
AssemblyTestPointUsage "Schematic Assembly Testpoint Usage_48" [InNet('TARGET_RESET_SENSE')] p62: valid=1
AssemblyTestPointUsage "Schematic Assembly Testpoint Usage_47" [InNet('NetQ108_6')] p63: valid=1
AssemblyTestPointUsage "Schematic Assembly Testpoint Usage_46" [InNet('NetQ108_1')] p64: valid=1
AssemblyTestPointUsage "Schematic Assembly Testpoint Usage_45" [InNet('NetQ101_6')] p65: valid=1
AssemblyTestPointUsage "Schematic Assembly Testpoint Usage_44" [InNet('NetQ101_1')] p66: valid=1
AssemblyTestPointUsage "Schematic Assembly Testpoint Usage_42" [InNet('NetC122_2')] p67: valid=1
AssemblyTestPointUsage "Schematic Assembly Testpoint Usage_41" [InNet('V-')] p68: valid=1
AssemblyTestPointUsage "Schematic Assembly Testpoint Usage_40" [InNet('NetQ102_3')] p69: valid=1
AssemblyTestPointUsage "Schematic Assembly Testpoint Usage_38" [InNet('NetD101_1')] p70: valid=1
AssemblyTestPointUsage "Schematic Assembly Testpoint Usage_37" [InNet('NetC1000_1')] p71: valid=1
AssemblyTestPointUsage "Schematic Assembly Testpoint Usage_36" [InNet('NetC815_1')] p72: valid=1
AssemblyTestPointUsage "Schematic Assembly Testpoint Usage_34" [InNet('NetC810_2')] p73: valid=1
AssemblyTestPointUsage "Schematic Assembly Testpoint Usage_39" [InNet('V+')] p74: valid=1
AssemblyTestPointUsage "Schematic Assembly Testpoint Usage_35" [InNet('NetC814_1')] p75: valid=1
AssemblyTestPointUsage "Schematic Assembly Testpoint Usage_31" [InNet('RX_P')] p76: valid=1
AssemblyTestPointUsage "Schematic Assembly Testpoint Usage_30" [InNet('RX_N')] p77: valid=1
AssemblyTestPointUsage "Schematic Assembly Testpoint Usage_29" [InNet('TX_P')] p78: valid=1
AssemblyTestPointUsage "Schematic Assembly Testpoint Usage_28" [InNet('TX_N')] p79: valid=1
AssemblyTestPointUsage "Schematic Assembly Testpoint Usage_27" [InNet('NetC704_2')] p80: valid=1
AssemblyTestPointUsage "Schematic Assembly Testpoint Usage_26" [InNet('NetC709_2')] p81: valid=1
AssemblyTestPointUsage "Schematic Assembly Testpoint Usage_25" [InNet('EDBG_USB_HS_P')] p82: valid=1
AssemblyTestPointUsage "Schematic Assembly Testpoint Usage_24" [InNet('EDBG_USB_HS_N')] p83: valid=1
AssemblyTestPointUsage "Schematic Assembly Testpoint Usage_23" [InNet('EDBG_USB_FS_P')] p84: valid=1
AssemblyTestPointUsage "Schematic Assembly Testpoint Usage_22" [InNet('EDBG_USB_FS_N')] p85: valid=1
AssemblyTestPointUsage "Schematic Assembly Testpoint Usage_33" [InNet('TARGET_USB_N')] p86: valid=1
AssemblyTestPointUsage "Schematic Assembly Testpoint Usage_32" [InNet('TARGET_USB_P')] p87: valid=1
AssemblyTestPointUsage "Schematic Assembly Testpoint Usage_21" [InNet('TARGET_USB_N')] p88: valid=1
AssemblyTestPointUsage "Schematic Assembly Testpoint Usage_17" [InNet('TARGET_USB_P')] p89: valid=1
AssemblyTestPointUsage "Schematic Assembly Testpoint Usage_16" [InNet('TX_P')] p90: valid=1
AssemblyTestPointUsage "Schematic Assembly Testpoint Usage_10" [InNet('TX_N')] p91: valid=1
AssemblyTestPointUsage "Schematic Assembly Testpoint Usage_9" [InNet('RX_P')] p92: valid=1
AssemblyTestPointUsage "Schematic Assembly Testpoint Usage_6" [InNet('RX_N')] p93: valid=1
AssemblyTestPointUsage "Schematic Assembly Testpoint Usage_5" [InNet('NetC704_2')] p94: valid=1
AssemblyTestPointUsage "Schematic Assembly Testpoint Usage_4" [InNet('NetC709_2')] p95: valid=1
AssemblyTestPointUsage "Schematic Assembly Testpoint Usage_3" [InNet('EDBG_USB_HS_P')] p96: valid=1
AssemblyTestPointUsage "Schematic Assembly Testpoint Usage_2" [InNet('EDBG_USB_HS_N')] p97: valid=1
AssemblyTestPointUsage "Schematic Assembly Testpoint Usage_1" [InNet('EDBG_USB_FS_P')] p98: valid=1
AssemblyTestPointUsage "Schematic Assembly Testpoint Usage" [InNet('EDBG_USB_FS_N')] p99: valid=1
AssemblyTestPointUsage "Schematic Assembly Testpoint Usage_8" [InNet('NetC823_1')] p100: valid=1
AssemblyTestPointUsage "Schematic Assembly Testpoint Usage_7" [InNet('NetC824_1')] p101: valid=1
AssemblyTestPointUsage "Schematic Assembly Testpoint Usage_20" [InNet('PA08_XOUT32')] p102: valid=1
AssemblyTestPointUsage "Schematic Assembly Testpoint Usage_19" [InNet('PA07_XIN32')] p103: valid=1
AssemblyTestPointUsage "Schematic Assembly Testpoint Usage_18" [InNet('PB09_XIN')] p104: valid=1
AssemblyTestPointUsage "Schematic Assembly Testpoint Usage_14" [InNet('NetJ301_1')] p105: valid=1
AssemblyTestPointUsage "Schematic Assembly Testpoint Usage_13" [InNet('NetJ300_1')] p106: valid=1
AssemblyTestPointUsage "Schematic Assembly Testpoint Usage_12" [InNet('XOUT0')] p107: valid=1
AssemblyTestPointUsage "Schematic Assembly Testpoint Usage_11" [InNet('XIN0')] p108: valid=1
AssemblyTestPointUsage "Schematic Assembly Testpoint Usage_15" [InNet('PB08_XOUT')] p109: valid=1
AssemblyTestPointUsage [All] p110:
AssemblyTestpoint [All] p1: testpointundercomponent=TRUE minsize=0.8 maxsize=10 preferedsize=0.8 minholesize=0 maxholesize=2 preferedholesize=0.25 testpointgrid=0.025 usegrid=FALSE gridtolerance=0 allowsidebottom=TRUE minspacing=1.27 compbodyclearance=0.127
Clearance Clearance_Poly_Impedance [IsRegion vs InDifferentialPairClass('All Differential Pairs')] p1: gap=0.6 ignorepadtopadclearanceinfootprint=FALSE except(0: Arc-Hole Track-Hole SMDPad-Hole THPad-Hole Via-Hole Fill-Hole Poly-Hole Region-Hole Text-Hole)
Clearance Clearance_Poly [IsRegion] p2: gap=0.2 ignorepadtopadclearanceinfootprint=FALSE except(0: Arc-Hole Track-Hole SMDPad-Hole THPad-Hole Via-Hole Fill-Hole Poly-Hole Region-Hole Text-Hole)
Clearance Clearance_EDBG [(WithinRoom('EDBG_Room') OR InNet('EDBG_USB_FS_N') OR InNet('EDBG_USB_FS_P'))] p3: gap=0.119 ignorepadtopadclearanceinfootprint=FALSE except(0: Arc-Hole Track-Hole SMDPad-Hole THPad-Hole Via-Hole Fill-Hole Poly-Hole Region-Hole Text-Hole)
Clearance [All] p4: gap=0.15 ignorepadtopadclearanceinfootprint=FALSE except(0: Arc-Hole Track-Hole SMDPad-Hole THPad-Hole Via-Hole Fill-Hole Poly-Hole Region-Hole Text-Hole)
ComponentClearance [All] p1: gap=0.1 collisioncheckmode=3 verticalgap=0.1 showdistances=FALSE
DiffPairsRouting DiffPairsRouting_100diff [InDifferentialPair('RX') OR InDifferentialPair('TX')] p1: maxlimit=0.2 minlimit=0.15 mostfreqgap=0.15 toplayer_minwidth=0.127 toplayer_maxwidth=0.13 toplayer_prefwidth=0.127 midlayer1_minwidth=0.127 midlayer1_maxwidth=0.13 midlayer1_prefwidth=0.127 midlayer2_minwidth=0.127 midlayer2_maxwidth=0.13 midlayer2_prefwidth=0.127 bottomlayer_minwidth=0.127 bottomlayer_maxwidth=0.13 bottomlayer_prefwidth=0.127 maxuncoupledlength=20
DiffPairsRouting DiffPairsRouting_90diff [InDifferentialPair('TARGET_USB') OR InDifferentialPair('EDBG_USB_HS')] p2: maxlimit=0.2 minlimit=0.173 mostfreqgap=0.173 toplayer_minwidth=0.175 toplayer_maxwidth=0.18 toplayer_prefwidth=0.175 midlayer1_minwidth=0.175 midlayer1_maxwidth=0.18 midlayer1_prefwidth=0.175 midlayer2_minwidth=0.175 midlayer2_maxwidth=0.18 midlayer2_prefwidth=0.175 bottomlayer_minwidth=0.175 bottomlayer_maxwidth=0.18 bottomlayer_prefwidth=0.175 maxuncoupledlength=20
DiffPairsRouting [All] p3: maxlimit=0.22 minlimit=0.18 mostfreqgap=0.2 toplayer_minwidth=0.125 toplayer_maxwidth=0.2 toplayer_prefwidth=0.18 midlayer1_minwidth=0.125 midlayer1_maxwidth=0.2 midlayer1_prefwidth=0.18 midlayer2_minwidth=0.125 midlayer2_maxwidth=0.2 midlayer2_prefwidth=0.18 bottomlayer_minwidth=0.125 bottomlayer_maxwidth=0.2 bottomlayer_prefwidth=0.18 maxuncoupledlength=20
FabricationTestPointUsage "Schematic Fabrication Testpoint Usage_141" [InNet('NetQ105_1')] p1: valid=1 allowmultiple=FALSE
FabricationTestPointUsage "Schematic Fabrication Testpoint Usage_140" [InNet('D12_LCD')] p2: valid=2 allowmultiple=FALSE
FabricationTestPointUsage "Schematic Fabrication Testpoint Usage_139" [InNet('D5_LCD')] p3: valid=2 allowmultiple=FALSE
FabricationTestPointUsage "Schematic Fabrication Testpoint Usage_138" [InNet('D2_LCD')] p4: valid=2 allowmultiple=FALSE
FabricationTestPointUsage "Schematic Fabrication Testpoint Usage_137" [InNet('D7_LCD')] p5: valid=2 allowmultiple=FALSE
FabricationTestPointUsage "Schematic Fabrication Testpoint Usage_136" [InNet('D3_LCD')] p6: valid=2 allowmultiple=FALSE
FabricationTestPointUsage "Schematic Fabrication Testpoint Usage_135" [InNet('D13_LCD')] p7: valid=2 allowmultiple=FALSE
FabricationTestPointUsage "Schematic Fabrication Testpoint Usage_134" [InNet('D11_LCD')] p8: valid=2 allowmultiple=FALSE
FabricationTestPointUsage "Schematic Fabrication Testpoint Usage_133" [InNet('D6_LCD')] p9: valid=2 allowmultiple=FALSE
FabricationTestPointUsage "Schematic Fabrication Testpoint Usage_132" [InNet('D15_LCD')] p10: valid=2 allowmultiple=FALSE
FabricationTestPointUsage "Schematic Fabrication Testpoint Usage_131" [InNet('D4_LCD')] p11: valid=2 allowmultiple=FALSE
FabricationTestPointUsage "Schematic Fabrication Testpoint Usage_130" [InNet('D10_LCD')] p12: valid=2 allowmultiple=FALSE
FabricationTestPointUsage "Schematic Fabrication Testpoint Usage_129" [InNet('D0_LCD')] p13: valid=2 allowmultiple=FALSE
FabricationTestPointUsage "Schematic Fabrication Testpoint Usage_128" [InNet('D1_LCD')] p14: valid=2 allowmultiple=FALSE
FabricationTestPointUsage "Schematic Fabrication Testpoint Usage_127" [InNet('D9_LCD')] p15: valid=2 allowmultiple=FALSE
FabricationTestPointUsage "Schematic Fabrication Testpoint Usage_126" [InNet('D8_LCD')] p16: valid=2 allowmultiple=FALSE
FabricationTestPointUsage "Schematic Fabrication Testpoint Usage_125" [InNet('D14_LCD')] p17: valid=2 allowmultiple=FALSE
FabricationTestPointUsage "Schematic Fabrication Testpoint Usage_124" [InNet('DQ9')] p18: valid=2 allowmultiple=FALSE
FabricationTestPointUsage "Schematic Fabrication Testpoint Usage_123" [InNet('DQ10')] p19: valid=2 allowmultiple=FALSE
FabricationTestPointUsage "Schematic Fabrication Testpoint Usage_122" [InNet('DQ14')] p20: valid=2 allowmultiple=FALSE
FabricationTestPointUsage "Schematic Fabrication Testpoint Usage_121" [InNet('DQ2')] p21: valid=2 allowmultiple=FALSE
FabricationTestPointUsage "Schematic Fabrication Testpoint Usage_120" [InNet('DQ8')] p22: valid=2 allowmultiple=FALSE
FabricationTestPointUsage "Schematic Fabrication Testpoint Usage_119" [InNet('DQ6')] p23: valid=2 allowmultiple=FALSE
FabricationTestPointUsage "Schematic Fabrication Testpoint Usage_118" [InNet('DQ1')] p24: valid=2 allowmultiple=FALSE
FabricationTestPointUsage "Schematic Fabrication Testpoint Usage_117" [InNet('DQ12')] p25: valid=2 allowmultiple=FALSE
FabricationTestPointUsage "Schematic Fabrication Testpoint Usage_116" [InNet('DQ0')] p26: valid=2 allowmultiple=FALSE
FabricationTestPointUsage "Schematic Fabrication Testpoint Usage_115" [InNet('DQ13')] p27: valid=2 allowmultiple=FALSE
FabricationTestPointUsage "Schematic Fabrication Testpoint Usage_114" [InNet('DQ15')] p28: valid=2 allowmultiple=FALSE
FabricationTestPointUsage "Schematic Fabrication Testpoint Usage_113" [InNet('DQ11')] p29: valid=2 allowmultiple=FALSE
FabricationTestPointUsage "Schematic Fabrication Testpoint Usage_112" [InNet('DQ4')] p30: valid=2 allowmultiple=FALSE
FabricationTestPointUsage "Schematic Fabrication Testpoint Usage_111" [InNet('DQ5')] p31: valid=2 allowmultiple=FALSE
FabricationTestPointUsage "Schematic Fabrication Testpoint Usage_110" [InNet('DQ7')] p32: valid=2 allowmultiple=FALSE
FabricationTestPointUsage "Schematic Fabrication Testpoint Usage_109" [InNet('DQ3')] p33: valid=2 allowmultiple=FALSE
FabricationTestPointUsage "Schematic Fabrication Testpoint Usage_100" [InNet('PC29')] p34: valid=2 allowmultiple=FALSE
FabricationTestPointUsage "Schematic Fabrication Testpoint Usage_99" [InNet('PC27')] p35: valid=2 allowmultiple=FALSE
FabricationTestPointUsage "Schematic Fabrication Testpoint Usage_98" [InNet('PC21')] p36: valid=2 allowmultiple=FALSE
FabricationTestPointUsage "Schematic Fabrication Testpoint Usage_107" [InNet('PD23')] p37: valid=2 allowmultiple=FALSE
FabricationTestPointUsage "Schematic Fabrication Testpoint Usage_105" [InNet('PC28')] p38: valid=2 allowmultiple=FALSE
FabricationTestPointUsage "Schematic Fabrication Testpoint Usage_71" [InNet('SDCKE')] p39: valid=2 allowmultiple=FALSE
FabricationTestPointUsage "Schematic Fabrication Testpoint Usage_69" [InNet('D3')] p40: valid=2 allowmultiple=FALSE
FabricationTestPointUsage "Schematic Fabrication Testpoint Usage_66" [InNet('D6')] p41: valid=2 allowmultiple=FALSE
FabricationTestPointUsage "Schematic Fabrication Testpoint Usage_65" [InNet('D15')] p42: valid=2 allowmultiple=FALSE
FabricationTestPointUsage "Schematic Fabrication Testpoint Usage_68" [InNet('D1')] p43: valid=2 allowmultiple=FALSE
FabricationTestPointUsage "Schematic Fabrication Testpoint Usage_67" [InNet('D2')] p44: valid=2 allowmultiple=FALSE
FabricationTestPointUsage "Schematic Fabrication Testpoint Usage_64" [InNet('PE05')] p45: valid=2 allowmultiple=FALSE
FabricationTestPointUsage "Schematic Fabrication Testpoint Usage_63" [InNet('PE04')] p46: valid=2 allowmultiple=FALSE
FabricationTestPointUsage "Schematic Fabrication Testpoint Usage_62" [InNet('PE03')] p47: valid=2 allowmultiple=FALSE
FabricationTestPointUsage "Schematic Fabrication Testpoint Usage_61" [InNet('PE02')] p48: valid=2 allowmultiple=FALSE
FabricationTestPointUsage "Schematic Fabrication Testpoint Usage_60" [InNet('PE01')] p49: valid=2 allowmultiple=FALSE
FabricationTestPointUsage "Schematic Fabrication Testpoint Usage_59" [InNet('PE00')] p50: valid=2 allowmultiple=FALSE
FabricationTestPointUsage "Schematic Fabrication Testpoint Usage_58" [InNet('PC07')] p51: valid=2 allowmultiple=FALSE
FabricationTestPointUsage "Schematic Fabrication Testpoint Usage_57" [InNet('PC06')] p52: valid=2 allowmultiple=FALSE
FabricationTestPointUsage "Schematic Fabrication Testpoint Usage_56" [InNet('PC05')] p53: valid=2 allowmultiple=FALSE
FabricationTestPointUsage "Schematic Fabrication Testpoint Usage_55" [InNet('PC04')] p54: valid=2 allowmultiple=FALSE
FabricationTestPointUsage "Schematic Fabrication Testpoint Usage_54" [InNet('PC03')] p55: valid=2 allowmultiple=FALSE
FabricationTestPointUsage "Schematic Fabrication Testpoint Usage_53" [InNet('PC02')] p56: valid=2 allowmultiple=FALSE
FabricationTestPointUsage "Schematic Fabrication Testpoint Usage_52" [InNet('PC01')] p57: valid=2 allowmultiple=FALSE
FabricationTestPointUsage "Schematic Fabrication Testpoint Usage_50" [InNet('PA16')] p58: valid=2 allowmultiple=FALSE
FabricationTestPointUsage "Schematic Fabrication Testpoint Usage_49" [InNet('PA15')] p59: valid=2 allowmultiple=FALSE
FabricationTestPointUsage "Schematic Fabrication Testpoint Usage_51" [InNet('PC00')] p60: valid=2 allowmultiple=FALSE
FabricationTestPointUsage "Schematic Fabrication Testpoint Usage_43" [InNet('NetJ404_41')] p61: valid=1 allowmultiple=FALSE
FabricationTestPointUsage "Schematic Fabrication Testpoint Usage_48" [InNet('TARGET_RESET_SENSE')] p62: valid=1 allowmultiple=FALSE
FabricationTestPointUsage "Schematic Fabrication Testpoint Usage_47" [InNet('NetQ108_6')] p63: valid=1 allowmultiple=FALSE
FabricationTestPointUsage "Schematic Fabrication Testpoint Usage_46" [InNet('NetQ108_1')] p64: valid=1 allowmultiple=FALSE
FabricationTestPointUsage "Schematic Fabrication Testpoint Usage_45" [InNet('NetQ101_6')] p65: valid=1 allowmultiple=FALSE
FabricationTestPointUsage "Schematic Fabrication Testpoint Usage_44" [InNet('NetQ101_1')] p66: valid=1 allowmultiple=FALSE
FabricationTestPointUsage "Schematic Fabrication Testpoint Usage_42" [InNet('NetC122_2')] p67: valid=1 allowmultiple=FALSE
FabricationTestPointUsage "Schematic Fabrication Testpoint Usage_41" [InNet('V-')] p68: valid=1 allowmultiple=FALSE
FabricationTestPointUsage "Schematic Fabrication Testpoint Usage_40" [InNet('NetC1000_1')] p69: valid=1 allowmultiple=FALSE
FabricationTestPointUsage "Schematic Fabrication Testpoint Usage_39" [InNet('NetQ102_3')] p70: valid=1 allowmultiple=FALSE
FabricationTestPointUsage "Schematic Fabrication Testpoint Usage_37" [InNet('NetD101_1')] p71: valid=1 allowmultiple=FALSE
FabricationTestPointUsage "Schematic Fabrication Testpoint Usage_36" [InNet('NetC810_2')] p72: valid=1 allowmultiple=FALSE
FabricationTestPointUsage "Schematic Fabrication Testpoint Usage_38" [InNet('V+')] p73: valid=1 allowmultiple=FALSE
FabricationTestPointUsage "Schematic Fabrication Testpoint Usage_35" [InNet('NetC814_1')] p74: valid=1 allowmultiple=FALSE
FabricationTestPointUsage "Schematic Fabrication Testpoint Usage_34" [InNet('NetC815_1')] p75: valid=1 allowmultiple=FALSE
FabricationTestPointUsage "Schematic Fabrication Testpoint Usage_31" [InNet('RX_P')] p76: valid=1 allowmultiple=FALSE
FabricationTestPointUsage "Schematic Fabrication Testpoint Usage_30" [InNet('RX_N')] p77: valid=1 allowmultiple=FALSE
FabricationTestPointUsage "Schematic Fabrication Testpoint Usage_29" [InNet('TX_P')] p78: valid=1 allowmultiple=FALSE
FabricationTestPointUsage "Schematic Fabrication Testpoint Usage_28" [InNet('TX_N')] p79: valid=1 allowmultiple=FALSE
FabricationTestPointUsage "Schematic Fabrication Testpoint Usage_27" [InNet('NetC704_2')] p80: valid=1 allowmultiple=FALSE
FabricationTestPointUsage "Schematic Fabrication Testpoint Usage_26" [InNet('NetC709_2')] p81: valid=1 allowmultiple=FALSE
FabricationTestPointUsage "Schematic Fabrication Testpoint Usage_25" [InNet('EDBG_USB_HS_P')] p82: valid=1 allowmultiple=FALSE
FabricationTestPointUsage "Schematic Fabrication Testpoint Usage_24" [InNet('EDBG_USB_HS_N')] p83: valid=1 allowmultiple=FALSE
FabricationTestPointUsage "Schematic Fabrication Testpoint Usage_23" [InNet('EDBG_USB_FS_P')] p84: valid=1 allowmultiple=FALSE
FabricationTestPointUsage "Schematic Fabrication Testpoint Usage_22" [InNet('EDBG_USB_FS_N')] p85: valid=1 allowmultiple=FALSE
FabricationTestPointUsage "Schematic Fabrication Testpoint Usage_33" [InNet('TARGET_USB_N')] p86: valid=1 allowmultiple=FALSE
FabricationTestPointUsage "Schematic Fabrication Testpoint Usage_32" [InNet('TARGET_USB_P')] p87: valid=1 allowmultiple=FALSE
FabricationTestPointUsage "Schematic Fabrication Testpoint Usage_20" [InNet('TARGET_USB_N')] p88: valid=1 allowmultiple=FALSE
FabricationTestPointUsage "Schematic Fabrication Testpoint Usage_17" [InNet('TARGET_USB_P')] p89: valid=1 allowmultiple=FALSE
FabricationTestPointUsage "Schematic Fabrication Testpoint Usage_11" [InNet('TX_P')] p90: valid=1 allowmultiple=FALSE
FabricationTestPointUsage "Schematic Fabrication Testpoint Usage_10" [InNet('TX_N')] p91: valid=1 allowmultiple=FALSE
FabricationTestPointUsage "Schematic Fabrication Testpoint Usage_9" [InNet('RX_P')] p92: valid=1 allowmultiple=FALSE
FabricationTestPointUsage "Schematic Fabrication Testpoint Usage_8" [InNet('RX_N')] p93: valid=1 allowmultiple=FALSE
FabricationTestPointUsage "Schematic Fabrication Testpoint Usage_7" [InNet('NetC704_2')] p94: valid=1 allowmultiple=FALSE
FabricationTestPointUsage "Schematic Fabrication Testpoint Usage_4" [InNet('NetC709_2')] p95: valid=1 allowmultiple=FALSE
FabricationTestPointUsage "Schematic Fabrication Testpoint Usage_3" [InNet('EDBG_USB_HS_P')] p96: valid=1 allowmultiple=FALSE
FabricationTestPointUsage "Schematic Fabrication Testpoint Usage_2" [InNet('EDBG_USB_HS_N')] p97: valid=1 allowmultiple=FALSE
FabricationTestPointUsage "Schematic Fabrication Testpoint Usage_1" [InNet('EDBG_USB_FS_P')] p98: valid=1 allowmultiple=FALSE
FabricationTestPointUsage "Schematic Fabrication Testpoint Usage" [InNet('EDBG_USB_FS_N')] p99: valid=1 allowmultiple=FALSE
FabricationTestPointUsage "Schematic Fabrication Testpoint Usage_6" [InNet('NetC823_1')] p100: valid=1 allowmultiple=FALSE
FabricationTestPointUsage "Schematic Fabrication Testpoint Usage_5" [InNet('NetC824_1')] p101: valid=1 allowmultiple=FALSE
FabricationTestPointUsage "Schematic Fabrication Testpoint Usage_21" [InNet('PA08_XOUT32')] p102: valid=1 allowmultiple=FALSE
FabricationTestPointUsage "Schematic Fabrication Testpoint Usage_19" [InNet('PA07_XIN32')] p103: valid=1 allowmultiple=FALSE
FabricationTestPointUsage "Schematic Fabrication Testpoint Usage_18" [InNet('PB09_XIN')] p104: valid=1 allowmultiple=FALSE
FabricationTestPointUsage "Schematic Fabrication Testpoint Usage_16" [InNet('NetJ301_1')] p105: valid=1 allowmultiple=FALSE
FabricationTestPointUsage "Schematic Fabrication Testpoint Usage_14" [InNet('NetJ300_1')] p106: valid=1 allowmultiple=FALSE
FabricationTestPointUsage "Schematic Fabrication Testpoint Usage_13" [InNet('XOUT0')] p107: valid=1 allowmultiple=FALSE
FabricationTestPointUsage "Schematic Fabrication Testpoint Usage_12" [InNet('XIN0')] p108: valid=1 allowmultiple=FALSE
FabricationTestPointUsage "Schematic Fabrication Testpoint Usage_15" [InNet('PB08_XOUT')] p109: valid=1 allowmultiple=FALSE
FabricationTestPointUsage TestPointUsage [All] p110: valid=0 allowmultiple=FALSE
FabricationTestpoint Testpoint [All] p1: side=2 testpointundercomponent=TRUE minsize=0.55 maxsize=10 preferedsize=0.8 minholesize=0 maxholesize=2 preferedholesize=0.25 testpointgrid=0 allowsidebottom=TRUE usegrid=FALSE gridtolerance=0 minspacing=1.27 compbodyclearance=0.127
HoleSize [All] p1: absolutevalues=TRUE maxlimit=10 minlimit=0.2 maxpercent=80.000 minpercent=20.000
HoleToHoleClearance [All] p1: gap=0.4 allowstackedmicrovias=TRUE
MatchedLengths MatchedLengths_DATA [InNetClass('DATA_BUS')] p1: tolerance=5 checknetsindiffpair=TRUE checkdiffpairvsdiffpair=FALSE checkxsignals=FALSE checkothers=FALSE
MatchedLengths MatchedLengths_ADDR [InNetClass('ADDRESS_BUS')] p2: tolerance=5 checknetsindiffpair=TRUE checkdiffpairvsdiffpair=FALSE checkxsignals=FALSE checkothers=FALSE
MinimumAnnularRing MinimumAnnularRing_EDBG [WithinRoom('EDBG_Room') OR WithinRoom('SDRAM_Room') OR WithinRoom('LCD_Room')] p1: minimumring=0.1
MinimumAnnularRing [All] p2: minimumring=0.15
MinimumSolderMaskSliver [All] p1: minsoldermaskwidth=0.075
NetAntennae [NOT (IsFabTestpoint OR IsAssyTestpoint)] p1: netantennaetolerance=2
PlaneClearance [All] p1: clearance=0.3
PlaneConnect PlaneConnect_50mil [InComponent('J300')] p1: planeconnectstyle=Relief reliefexpansion=0.2 reliefentries=4 reliefconductorwidth=0.2 reliefairgap=0.2
PlaneConnect PlaneConnect_VIA [IsVia OR HasPad('Free-666')] p2: planeconnectstyle=Direct reliefexpansion=0.508 reliefentries=4 reliefconductorwidth=0.254 reliefairgap=0.254
PlaneConnect [All] p3: planeconnectstyle=Relief reliefexpansion=0.508 reliefentries=4 reliefconductorwidth=0.254 reliefairgap=0.254
PolygonConnect PolygonConnect_VIA [IsVia OR HasPad('Free-666')] p1: connectstyle=Direct reliefconductorwidth=0.254 reliefentries=4 polygonreliefangle="90 Angle" airgapwidth=0.254
PolygonConnect [All] p2: connectstyle=Relief reliefconductorwidth=0.2 reliefentries=4 polygonreliefangle="90 Angle" airgapwidth=0.2
RoomDefinition EDBG_Room [InComponentClass('Components Class 1')] p1: confinementstyle=ConfineIn formatcopy=TRUE lockcomponents=FALSE outline -29.475,-12.825 -20.05,-12.825 -20.05,-21.925 -29.475,-21.925
RoomDefinition LCD_ROOM [InComponentClass('Components Class 1')] p2: confinementstyle=ConfineIn formatcopy=TRUE lockcomponents=FALSE outline -87.556,-67.1 -84.739,-67.1 -84.739,-78.1 -87.556,-78.1
RoomDefinition SDRAM_Room [InComponentClass('Components Class 1')] p3: confinementstyle=ConfineIn formatcopy=TRUE lockcomponents=FALSE outline -57.717,-70.425 -49.874,-70.425 -49.874,-81.046 -57.717,-81.046
RoutingVias RoutingVias_small [WithinRoom('EDBG_Room') OR WithinRoom('SDRAM_Room') OR WithinRoom('LCD_ROOM')] p1: holewidth=0.25 width=0.55 viastyle="Through Hole" minholewidth=0.2 minwidth=0.4 maxholewidth=0.5 maxwidth=1
RoutingVias [All] p2: holewidth=0.25 width=0.55 viastyle="Through Hole" minholewidth=0.25 minwidth=0.55 maxholewidth=0.5 maxwidth=1
SMDNeckDown [All] p1: percent=90.000
SilkToSilkClearance SilkToSilkClearance_Text [IsText vs IsText] p1: silktosilkclearance=0
SilkToSilkClearance [All] p2: silktosilkclearance=0.1
SilkToSolderMaskClearance SilkscreenOverComponentPads [IsPad] p1: minsilkscreentomaskgap=0.1 clearancetoexposedcopper=TRUE
SolderMaskExpansion SolderMaskTenting [IsVia AND NOT (IsFabTestpoint OR IsAssyTestpoint)] p1: expansion=-1
SolderMaskExpansion [All] p2: expansion=0.05
ViasUnderSMD [All] p1: allowed=FALSE
Width Width_Data_Bus [InNetClass('DATA_BUS')] p1: maxlimit=0.179 minlimit=0.126 preferedwidth=0.179 toplayer_minwidth=0.179 midlayer1_minwidth=0.155 midlayer1_maxwidth=0.155 midlayer1_prefwidth=0.155 midlayer2_maxwidth=0.126 midlayer2_prefwidth=0.126 bottomlayer_minwidth=0.179 minimp=50.000000 maximp=50.000000 favimp=50.000000
Width Width_Address_Bus [InNetClass('ADDRESS_BUS')] p2: maxlimit=0.179 minlimit=0.126 preferedwidth=0.179 toplayer_minwidth=0.179 midlayer1_minwidth=0.155 midlayer1_maxwidth=0.155 midlayer1_prefwidth=0.155 midlayer2_maxwidth=0.126 midlayer2_prefwidth=0.126 bottomlayer_minwidth=0.179 minimp=50.000000 maximp=50.000000 favimp=50.000000
Width Width_Trace [InNetClass('TRACE')] p3: maxlimit=0.185 minlimit=0.185 preferedwidth=0.185
Width EDBG_Width [WithinRoom('EDBG_Room')] p4: maxlimit=0.254 minlimit=0.125 preferedwidth=0.175
Width [All] p5: maxlimit=10 minlimit=0.15 preferedwidth=0.175
16 further rules are at their usual default settings.

## Classes and differential pairs
component class Audio: C800 C801 C802 C803 C804 C805 C806 C807 C808 C809 C810 C811 C812 C813 C814 C815 C816 C817 C818 C819 C820 C821 C822 C823 C824 C825 C826 C827 C828 C829 J800 J801 L800 L801 L802 L803 L804 L805 L806 R800 R801 R802 R803 R804 R806 R807 R808 R809 R810 R811 R812 R813 R814 R815 R816 R817 R818 R819 U800 U801 XC800
component class Connectors: J400 J401 J402 J403 J404 J405 J406 R400 R401 R402 R403 R404
component class EDBG: C900 C901 C902 C903 C904 C905 C906 C907 C908 C909 C910 C911 C912 C913 C914 C915 D900 D901 D902 J900 L900 L901 Q900 R900 R901 R902 R903 R904 R905 R906 R907 R908 R909 R910 R911 R912 R913 R914 R915 R916 R917 R918 R919 R920 R921 TP900 TP901 TP902 TP903 TP904 TP905 TP906 TP907 U900 XC900
component class Ethernet: C700 C701 C702 C703 C704 C705 C706 C707 C708 C709 C710 C711 C712 C713 J700 L700 L701 L702 R700 R701 R702 R703 R704 R705 R706 R707 R708 R709 R710 R711 R712 R713 R714 R715 R716 R717 R718 R719 R720 U700 XC700
component class Memory: C600 C601 C602 C603 C604 C605 C606 C607 C608 C609 C610 C611 C612 C613 J600 R600 R601 R602 R603 R604 R605 R606 R607 R608 R609 R610 R611 R612 R613 R614 R615 R616 R617 R618 R619 R620 R621 R622 R623 R624 R625 R626 R627 R628 R629 R630 R631 R632 R633 R634 R635 R636 R637 R638 R639 R640 R641 R642 R643 R644 TP600 U600 U601 U602 U603 U604
component class Peripherals: C300 C301 C302 C303 C304 C305 D300 D301 D302 J300 J301 J302 R300 R301 R302 R303 R304 R305 R306 R307 SW300 SW301 TP300 XC300 XC301
component class "Power Converter": C107 C108 C109 C110 C111 C112 C113 C114 C115 C116 C117 C118 C119 C120 L101 L102 Q106 Q107 R122 R123 R124 R125 R126 R127 R128 R129 R130 R131 R132 R133 R134 SW101 U104
component class SAMV71_Xplained_Ultra_TopLevel: E1 E2 E3 E4 FW1 LABEL1
component class "Shield Connectors": J500 J501 J502 J503 J504 J505 J506 J507
component class "Target MCU": C200 C201 C202 C203 C204 C205 C206 C207 C208 C209 C210 C211 C212 C213 C214 C215 C216 C217 C218 C219 J200 J201 J202 JS200 JS201 JS202 L200 L201 L202 R200 R201 R202 R203 R204 R205 R206 R207 R208 R209 R210 R211 R212 R213 R214 R215 R216 R217 R218 R219 R220 R221 R222 R223 R224 R225 R226 R227 R228 R229 R230 R231 R232 R233 R234 R235 R236 R237 R238 R239 R240 R241 R242 R243 R244 R245 R246 R247 R248 R249 R250 R251 R252 R253 R254 R255 R256 R257 R258 R259 R260 R261 R262 R263 R264 R265 R266 R267 R268 R269 R270 TP200 TP201 U200
component class CAN: C1000 C1001 C1002 C1003 J1000 R1000 R1001 U1000
component class "Power Multiplexer": C105 C106 Q104 Q105 R113 R114 R115 R116 R117 R118 R119 R120 R121 U102 U103
component class "Power supply": C100 C101 C102 C103 C104 C121 C122 C123 C124 C125 C1103 D100 D101 J100 J101 J102 J103 JS100 JS101 L100 Q100 Q101 Q102 Q103 Q108 R100 R101 R102 R103 R104 R105 R106 R107 R108 R109 R110 R111 R112 R135 R136 R137 R138 R139 R140 R141 R142 R143 SW100 TP100 U100 U101 U105 U106
net class DATA_BUS: D0 D0_LCD D1 D1_LCD D2 D2_LCD D3 D3_LCD D4 D4_LCD D5 D5_LCD D6 D6_LCD D7 D7_LCD D8 D8_LCD D9 D9_LCD D10 D10_LCD D11 D11_LCD D12 D12_LCD D13 D13_LCD D14 D14_LCD D15 D15_LCD DQ0 DQ1 DQ2 DQ3 DQ4 DQ5 DQ6 DQ7 DQ8 DQ9 DQ10 DQ11 DQ12 DQ13 DQ14 DQ15 PA15 PA16 PC00 PC01 PC02 PC03 PC04 PC05 PC06 PC07 PE00 PE01 PE02 PE03 PE04 PE05
net class ADDRESS_BUS: A0/NBS0 A2 A3 A4 A5 A6 A7 A8 A9 A10 A11 BA0 CAS NWR1/NBS1 PA20 PC15 PC18 PC20 PC21 PC22 PC23 PC24 PC25 PC26 PC27 PC28 PC29 PD13 PD14 PD15 PD16 PD17 PD23 PD29 RAS SDA10 SDCK SDCKE SDCS SDWE
net class TRACE: PB05 PB06_SWDIO PB07_SWCLK PD04 PD05 PD06 PD07 PD08
differential pair TARGET_USB: +TARGET_USB_P -TARGET_USB_N
differential pair EDBG_USB_HS: +EDBG_USB_HS_P -EDBG_USB_HS_N
differential pair EDBG_USB_FS: +EDBG_USB_FS_P -EDBG_USB_FS_N
differential pair RX: +RX_P -RX_N
differential pair TX: +TX_P -TX_N

## Components (designator, comment, footprint, x,y, rotation, side; value= is the part's Value field where it differs from the comment)
C100 "" AP1-00003 -65.2,-20 r90 bottom value=22u/10V
C101 "" AP1-00003 -67.6,-16.3 r0 bottom value=10u
C102 "" AP1-00001 -72.125,-18.775 r270 bottom value=3.3n
C103 "" AP1-00122 -62.325,-8.15 r90 top value=100mF
C104 "" AP1-00053 -23.6,-10.675 r180 top locked value=10n
C105 "" AP1-00001 -21.2,-4.65 r180 bottom locked value=100n
C106 "" AP1-00001 -20.65,-10.675 r180 bottom value=100n
C107 "" AP1-00039 -50.707,-16.205 r0 bottom value=4.7uF
C108 "Farnell no: 1288200" AP1-00053 -58.982,-13.13 r270 bottom value=2.2uF
C109 "Farnell no: 1288200" AP1-00053 -50.707,-10.405 r0 bottom value=2.2uF
C110 "Farnell no: 1288200" AP1-00053 -50.707,-11.324 r0 bottom value=2.2uF
C111 "Farnell no: 1288200" AP1-00053 -50.707,-15.08 r0 bottom value=2.2uF
C112 "" AP1-00041 -56.582,-17.405 r0 bottom locked value=10uF
C113 "" AP1-00041 -56.607,-8.905 r0 bottom locked value=10uF
C114 "" AP1-00053 -52.007,-22.405 r90 bottom value=8.2p
C115 "" AP1-00041 -56.032,-20.205 r0 bottom locked value=10uF
C116 "" AP1-00053 -52.832,-4.005 r270 bottom value=6.8p
C117 "" AP1-00041 -56.032,-6.155 r0 bottom locked value=10uF
C118 "" AP1-00053 -52.832,-6.455 r270 bottom value=33p
C119 "" AP1-00053 -50.707,-12.742 r0 bottom value=1uF
C120 "" AP1-00053 -50.707,-13.661 r0 bottom value=1uF
C121 "" AP1-00001 -65.857,-7.909 r90 bottom value=100n
C122 "" AP1-00053 -67.986,-4.521 r270 bottom value=100n
C123 "" AP1-00001 -66.456,-12.637 r0 bottom value=15p
C124 "" AP1-00001 -66.456,-13.834 r180 bottom value=100n
C125 "" AP1-00001 -73.755,-10.769 r270 bottom value=100n
C200 "" AP1-00053 -58.8,-43.3 r180 top value=100n
C201 "" AP1-00053 -58.8,-55.75 r180 top value=100n
C202 "" AP1-00053 -50.75,-63.8 r270 top value=100n
C203 "" AP1-00053 -36.25,-63.8 r270 top value=100n
C204 "" AP1-00053 -31.2,-55.25 r0 top value=100n
C205 "" AP1-00053 -31.2,-47.25 r0 top value=100n
C206 "" AP1-00053 -48.25,-36.9 r0 top value=100n
C207 "" AP1-00053 -56.05,-38.25 r180 top value=100n
C208 "" AP1-00053 -58.8,-42.2 r180 top value=100n
C209 "" AP1-00053 -58.8,-54.65 r180 top value=100n
C210 "" AP1-00053 -58.8,-57.25 r180 top value=100n
C211 "" AP1-00053 -47.25,-63.8 r270 top value=100n
C212 "" AP1-00053 -31.2,-54.15 r0 top value=100n
C213 "" AP1-00053 -31.375,-41.475 r0 top value=100n
C214 "" AP1-00053 -43.825,-36.9 r180 top value=100n
C215 "" AP1-00036 -60.65,-40.125 r180 top value=2.2uF
C216 "" AP1-00041 -31.725,-45.725 r0 top locked value=10uF
C217 "" AP1-00053 -51.3,-36.2 r90 top value=100n
C218 "" AP1-00053 -58.8,-45.25 r180 top value=100n
C219 "" AP1-00053 -52.45,-36.5 r90 top value=10p
C300 "" AP1-00001 -59.275,-59.075 r180 top value=4.7p
C301 "" AP1-00001 -62.225,-59.075 r180 top value=4.7p
C302 "" AP1-00001 -53.275,-32.925 r90 top value=12p
C303 "" AP1-00001 -59.35,-35.75 r180 top value=12p
C304 "" AP1-00053 -51.2,-6.978 r90 top locked value=4.7n
C600 "" AP1-00001 -38.025,-86.925 r180 top value=100n
C601 "" AP1-00001 -38.025,-82.475 r180 top value=100n
C602 "" AP1-00001 -36.225,-76.825 r270 top value=100n
C603 "Farnell no: 1288200" AP1-00053 -56.13,-80.773 r180 bottom value=2.2uF
C604 "" AP1-00053 -56.13,-81.623 r180 bottom value=100n
C605 "" AP1-00053 -55.982,-70.321 r0 bottom value=100n
C606 "" AP1-00053 -55.547,-76.175 r270 bottom value=100n
C607 "" AP1-00053 -55.378,-79.1 r90 bottom value=100n
C608 "" AP1-00053 -52.3,-79.15 r270 bottom value=100n
C609 "" AP1-00053 -53.922,-77.125 r90 bottom value=100n
C610 "" AP1-00053 -52.3,-77.2 r270 bottom value=100n
C611 "" AP1-00001 -25.325,-68.1 r90 top value=100n
C612 "" AP1-00041 -47.823,-104.55 r270 top locked value=10uF
C613 "" AP1-00001 -46.248,-105.15 r270 top value=100n
C700 "" AP1-00001 -10.25,-100.2 r270 top value=100n
C701 "" AP1-00003 -9.05,-102.55 r180 top value=22u/10V
C702 "" AP1-00001 -4.4,-94.625 r0 top value=100n
C703 "" AP1-00003 -5.9,-103.325 r90 top value=22u/10V
C704 "" AP1-00001 -11.525,-100.45 r90 top value=22p
C705 "" AP1-00001 -3.225,-113.025 r0 top value=100n
C706 "" AP1-00001 -3.225,-114.665 r0 top value=100n
C707 "" AP1-00001 -5.1,-99.675 r270 top value=100n
C708 "" AP1-00041 -3.525,-99.15 r270 top locked value=10uF
C709 "" AP1-00001 -15.65,-98.65 r0 top value=22p
C710 "" AP1-00001 -4.4,-97.825 r0 top value=100n
C711 "" AP1-00001 -13.95,-96.125 r180 top value=100n
C712 "" AP1-00041 -13.15,-93.275 r180 top locked value=10uF
C713 "" AP1-00001 -15.75,-96.575 r270 top value=100n
C800 "" AP1-00001 -69.975,-107.875 r180 top value=22p
C801 "" AP1-00001 -79.4,-116.15 r0 top value=100n
C802 "" AP1-00001 -85.4,-116.15 r180 top value=100n
C803 "" AP1-00001 -79.4,-117.35 r0 top value=470p
C804 "" AP1-00001 -85.4,-117.35 r180 top value=470p
C805 "" AP1-00038 -70.333,-114.376 r90 top value=1uF
C806 "" AP1-00001 -81.05,-109.275 r180 top value=100n
C807 "" AP1-00001 -81.05,-110.375 r180 top value=100n
C808 "" AP1-00039 -75.4,-112.7 r270 top value=4.7uF
C809 "" AP1-00038 -66.802,-114.376 r90 top value=1uF
C810 "Farnell no: 1288200" AP1-00001 -80.3,-105.6 r0 top value=2.2uF
C811 "" AP1-00039 -76.6,-112.7 r270 top value=4.7uF
C812 "" AP1-00001 -71.55,-117.5 r180 top value=470p
C813 "" AP1-00001 -65.575,-117.5 r0 top value=470p
C814 "" AP1-00001 -80.3,-107.8 r180 top value=4.7uF
C815 "" AP1-00001 -80.3,-106.7 r180 top value=4.7uF
C816 "" AP1-00001 -78.875,-112.75 r180 top value=100n
C817 "" AP1-00039 -78.975,-111.55 r180 top value=4.7uF
C818 "" AP1-00001 -75.25,-103.283 r90 top value=100n
C819 "" AP1-00039 -74.025,-103.183 r90 top value=4.7uF
C820 "Farnell no: 1288200" AP1-00001 -73.5,-111.975 r0 top value=2.2uF
C821 "" AP1-00001 -73.5,-110.875 r0 top value=100n
C822 "" AP1-00001 -55.65,-85.35 r180 top value=100n
C823 "" AP1-00001 -58.975,-93.425 r270 top value=39p
C824 "" AP1-00001 -61.375,-85.625 r0 top value=39p
C825 "" AP1-00039 -81.175,-103.675 r90 top value=4.7uF
C826 "" AP1-00001 -79.975,-103.775 r90 top value=100n
C827 "" AP1-00001 -78.85,-103.775 r90 top value="1 nF C0G"
C828 "" AP1-00039 -77.05,-101.075 r180 top value=4.7uF
C829 "" AP1-00001 -77.75,-103.275 r90 top value=100n
C900 "" AP1-00053 -16.9,-21.7 r90 bottom locked value=22p
C901 "" AP1-00053 -16.9,-19.8 r270 bottom locked value=22p
C902 "" AP1-00053 -17.475,-16.425 r0 bottom locked value=10p
C903 "" AP1-00053 -18.1,-6.9 r90 top locked value=4.7n
C904 "" AP1-00053 -31.55,-15.6 r180 bottom locked value=100n
C905 "Farnell no: 1288200" AP1-00053 -25.375,-11.8 r180 bottom locked value=2.2uF
C906 "" AP1-00053 -25.375,-12.7 r180 bottom locked value="1 nF C0G"
C907 "" AP1-00053 -12.6,-9.1 r270 top locked value="1 nF C0G"
C908 "" AP1-00053 -11.3,-9.1 r270 top locked value="1 nF C0G"
C909 "Farnell no: 1288200" AP1-00053 -23.275,-11.8 r0 bottom locked value=2.2uF
C910 "" AP1-00053 -23.275,-12.7 r0 bottom locked value=100n
C911 "" AP1-00053 -19.675,-18 r0 bottom locked value=100n
C912 "" AP1-00053 -25.25,-22.2 r0 bottom locked value=100n
C913 "" AP1-00053 -29.875,-18.6 r270 bottom locked value=100n
C914 "Farnell no: 1288200" AP1-00053 -30.75,-18.6 r270 bottom locked value=2.2uF
C915 "Farnell no: 1288200" AP1-00053 -25.25,-22.95 r0 bottom value=2.2uF
C1000 "" AP1-00003 -53.95,-122.455 r0 top value=4.7uF
C1001 "" AP1-00001 -56.4,-116.58 r180 top value=15p
C1002 "" AP1-00001 -53.925,-116.58 r0 top value=100n
C1003 "" AP1-00001 -56.25,-119.83 r90 top value=100n
D100 "" AP5-00002 -61.848,-12.981 r180 bottom value=BAT54C
D101 "" AP4-00007 -64.573,-4.406 r0 bottom value=BAT54
D300 "" AP4-00013 -86.005,-28.35 r180 top value=EL17-21UYC/A3
D301 "" AP4-00013 -33.1,-12 r180 top locked value=EL17-21UYC/A3
D302 "" AP4-00001 -49.159,-7.028 r0 top value=PRTR5V0U2X
D900 "" AP4-00013 -8.75,-2.5 r90 top locked value=EL17-21SYGC
D901 "" AP4-00013 -6.5,-2.5 r90 top locked value=EL17-21UYC/A3
D902 "" AP4-00001 -16.325,-7.178 r0 top locked value=PRTR5V0U2X
E1 "" AP8-00192 -9,-4.5 r180 bottom locked value=SJ-5076
E2 "" AP8-00192 -81,-4.5 r180 bottom locked value=SJ-5076
E3 "" AP8-00192 -9,-130.5 r180 bottom locked value=SJ-5076
E4 "" AP8-00192 -81,-130.5 r180 bottom value=SJ-5076
J100 "" AP8-00853 -74.45,-7.7 r270 top value="NEB 21 R"
J101 "" AP8-00628 -5.7,-14.76 r270 top locked value=P101-2*02RGF-139-ND
J102 "" AP8-00367 -40,-10.95 r0 top locked value="Pin header 1x2 right angle"
J103 "" AP8-00733 -62.51,-19.717 r90 top locked value=HMTSW-102-23-F-S-237
J200 "" AP8-00733 -27.442,-53.025 r90 top value=HMTSW-102-23-F-S-237
J201 "" AP8-00733 -61.55,-44.23 r90 top value=HMTSW-102-23-F-S-237
J202 "" AP8-00745 -27.442,-38.89 r90 top locked value=HMTSW-103-23-F-S-237
J300 "" AP9-00044 -58.75,-61.225 r90 top net-tie value=SMD-STRAP_0603_CLOSED
J301 "" AP9-00044 -54.575,-32.575 r270 top net-tie value=SMD-STRAP_0603_CLOSED
J302 "2,000 pieces per reel" AP8-00852 -48.434,-1.675 r180 top locked value=ZX62D-AB-5P8
J400 "" AP8-00884 -76.185,-37.874 r90 top locked value=TSM-115-01-L-DV-LC
J401 "" AP8-00622 -5.7,-40.16 r270 top locked value=P101-2*10RGF-139-ND
J402 "" AP8-00622 -5.7,-75.72 r270 top locked value=P101-2*10RGF-139-ND
J403 "" AP8-00910 -40.325,-19.875 r270 top value=FTSH-110-01-F-DV-007-K
J404 "Used for Xplained Pro MCU board on top layer." AP8-00774 -88.15,-79.35 r270 top locked value=5-1734839-0
J405 "For SMSC MediaLB,  / Mates with QTH-020-01-X-D-DP-XXX" AP8-00878 -78,-83.95 r0 top value=QSH-020-01-L-D-DP-A
J406 "" AP8-00744 -85.71,-44.224 r90 top locked value=HMTSW-110-23-F-D-237
J500 "" AP8-00822 -19.67,-35.08 r90 top locked value=SSQ-110-21-F-S
J501 "" AP8-00823 -67.93,-41.684 r270 top locked value=SSQ-108-21-F-S
J502 "" AP8-00823 -67.93,-64.544 r270 top locked value=SSQ-108-21-F-S
J503 "" AP8-00823 -19.67,-59.464 r90 top locked value=SSQ-108-21-F-S
J504 "" AP8-00823 -67.93,-87.404 r270 top locked value=SSQ-108-21-F-S
J505 "" AP8-00823 -19.67,-82.324 r90 top locked value=SSQ-108-21-F-S
J506 "" AP8-00182 -42.53,-69.751 r180 top locked value=HMTSW-103-23-F-D-237
J507 "" AP8-00259 -41.26,-100.104 r180 top locked value=SSQ-118-01-G-D
J600 "" AP8-00377 -45.053,-115.2 r0 bottom value="KYOCERA - 14 5738 009 220 859+"
J700 "" AP8-00749 -16.075,-121.125 r180 top locked value=74980111211
J800 "Farnell No:1216980" AP8-00397 -80.425,-127.075 r180 top locked value="1503 03"
J801 "Farnell No:1216980" AP8-00397 -67.925,-127.025 r180 top locked value="1503 03"
J900 "2,000 pieces per reel" AP8-00852 -15.6,-1.675 r180 top locked value=ZX62D-AB-5P8
J1000 "" AP8-00733 -60.35,-131.675 r90 top locked value=HMTSW-102-23-F-S-237
JS100 "" AP8-00525 -40.1,-5.3 r0 top locked value=SNT-100-BK-G
JS101 "" AP8-00525 -62.51,-19.717 r90 top value=SNT-100-BK-G
JS200 "" AP8-00525 -28.675,-51.696 r180 top value=SNT-100-BK-G
JS201 "" AP8-00525 -61.55,-44.23 r90 top value=SNT-100-BK-G
JS202 "" AP8-00525 -27.442,-40.16 r90 top value=SNT-100-BK-G
L100 "" AP3-00119 -67.5,-24.125 r0 bottom value=XAL4020-222ME
L101 "" AP3-00119 -58.857,-20.555 r270 bottom value=XAL4020-222ME
L102 "" AP3-00119 -58.857,-5.83 r90 bottom value=XAL4020-222ME
L200 "" AP3-00005 -58.775,-46.4 r0 top value=BLM18PG471SN1
L201 "" AP3-00005 -43.175,-34.95 r270 top value=BLM18PG471SN1
L202 "" AP3-00005 -51.3,-33.126 r270 top value=BLM18PG471SN1
L700 "" AP3-00005 -8.875,-104.225 r0 top value=BLM18PG471SN1
L701 "" AP3-00005 -1.925,-98.475 r270 top value=BLM18PG471SN1
L702 "" AP3-00005 -3.225,-118.075 r180 top value=BLM18PG471SN1
L800 "" AP3-00028 -83.075,-116.75 r270 top value=BLM15PD800SN1
L801 "" AP3-00028 -81.725,-116.75 r270 top value=BLM15PD800SN1
L802 "" AP3-00028 -69.225,-116.8 r90 top value=BLM15PD800SN1
L803 "" AP3-00028 -67.9,-116.8 r90 top value=BLM15PD800SN1
L804 "" AP3-00104 -79.05,-114.3 r0 top locked value=BLM21PG121SN1D
L805 "" AP3-00104 -72.975,-113.525 r180 top locked value=BLM21PG121SN1D
L806 "" AP3-00104 -83.325,-103.25 r270 top locked value=BLM21PG121SN1D
L900 "" AP3-00005 -11.9,-7.5 r0 top locked value=BLM18PG471SN1
L901 "" AP3-00005 -31.95,-16.7 r0 bottom locked value=BLM18PG471SN1
LABEL1 "" AP8-00317 -6.612,-125.396 r90 bottom value="Label PCBA (ES)"
Q100 "" AP5-00002 -74.45,-16.975 r270 bottom value=IRLML5203PBF
Q101 "Farnell no: 9844856" AP5-00008 -16.512,-16.495 r180 top value=FDC6327C
Q102 "" AP4-00018 -63.348,-8.218 r180 bottom value=BSH202
Q103 "" AP5-00002 -10.4,-12.4 r0 bottom locked value=IRLML6402
Q104 "" AP5-00002 -14.5,-11.45 r0 bottom locked value=IRLML6402
Q105 "" AP5-00002 -14.5,-15 r180 bottom locked value=2N7002,215